# EAGLE board SparkFun_RFM97CW_Breakout-Panel (EAGLE 9.6.2), part 1 of 4
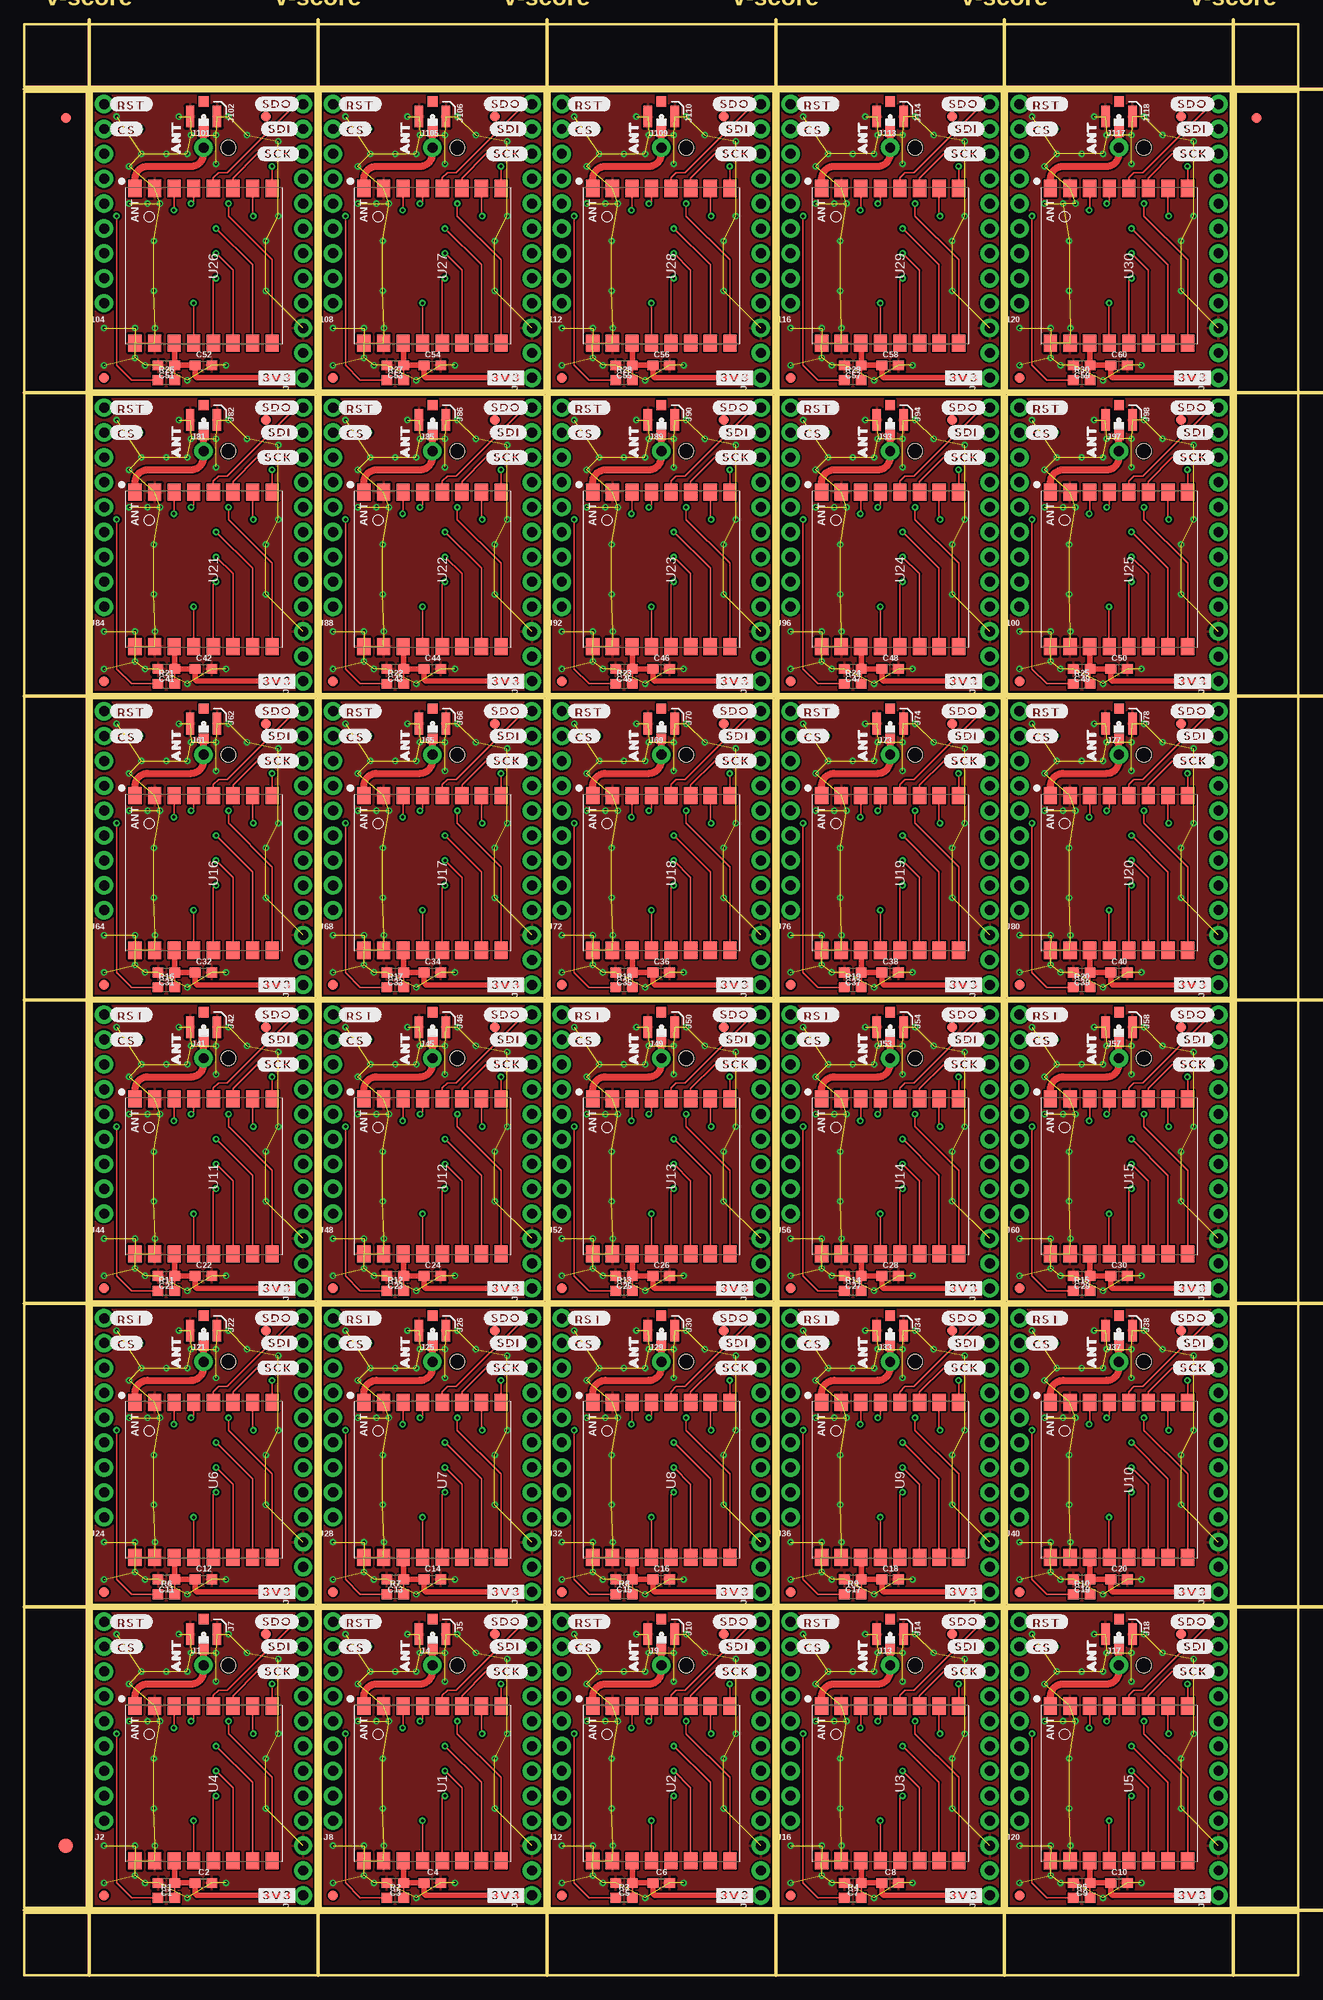
[diagram p0: board, top side]
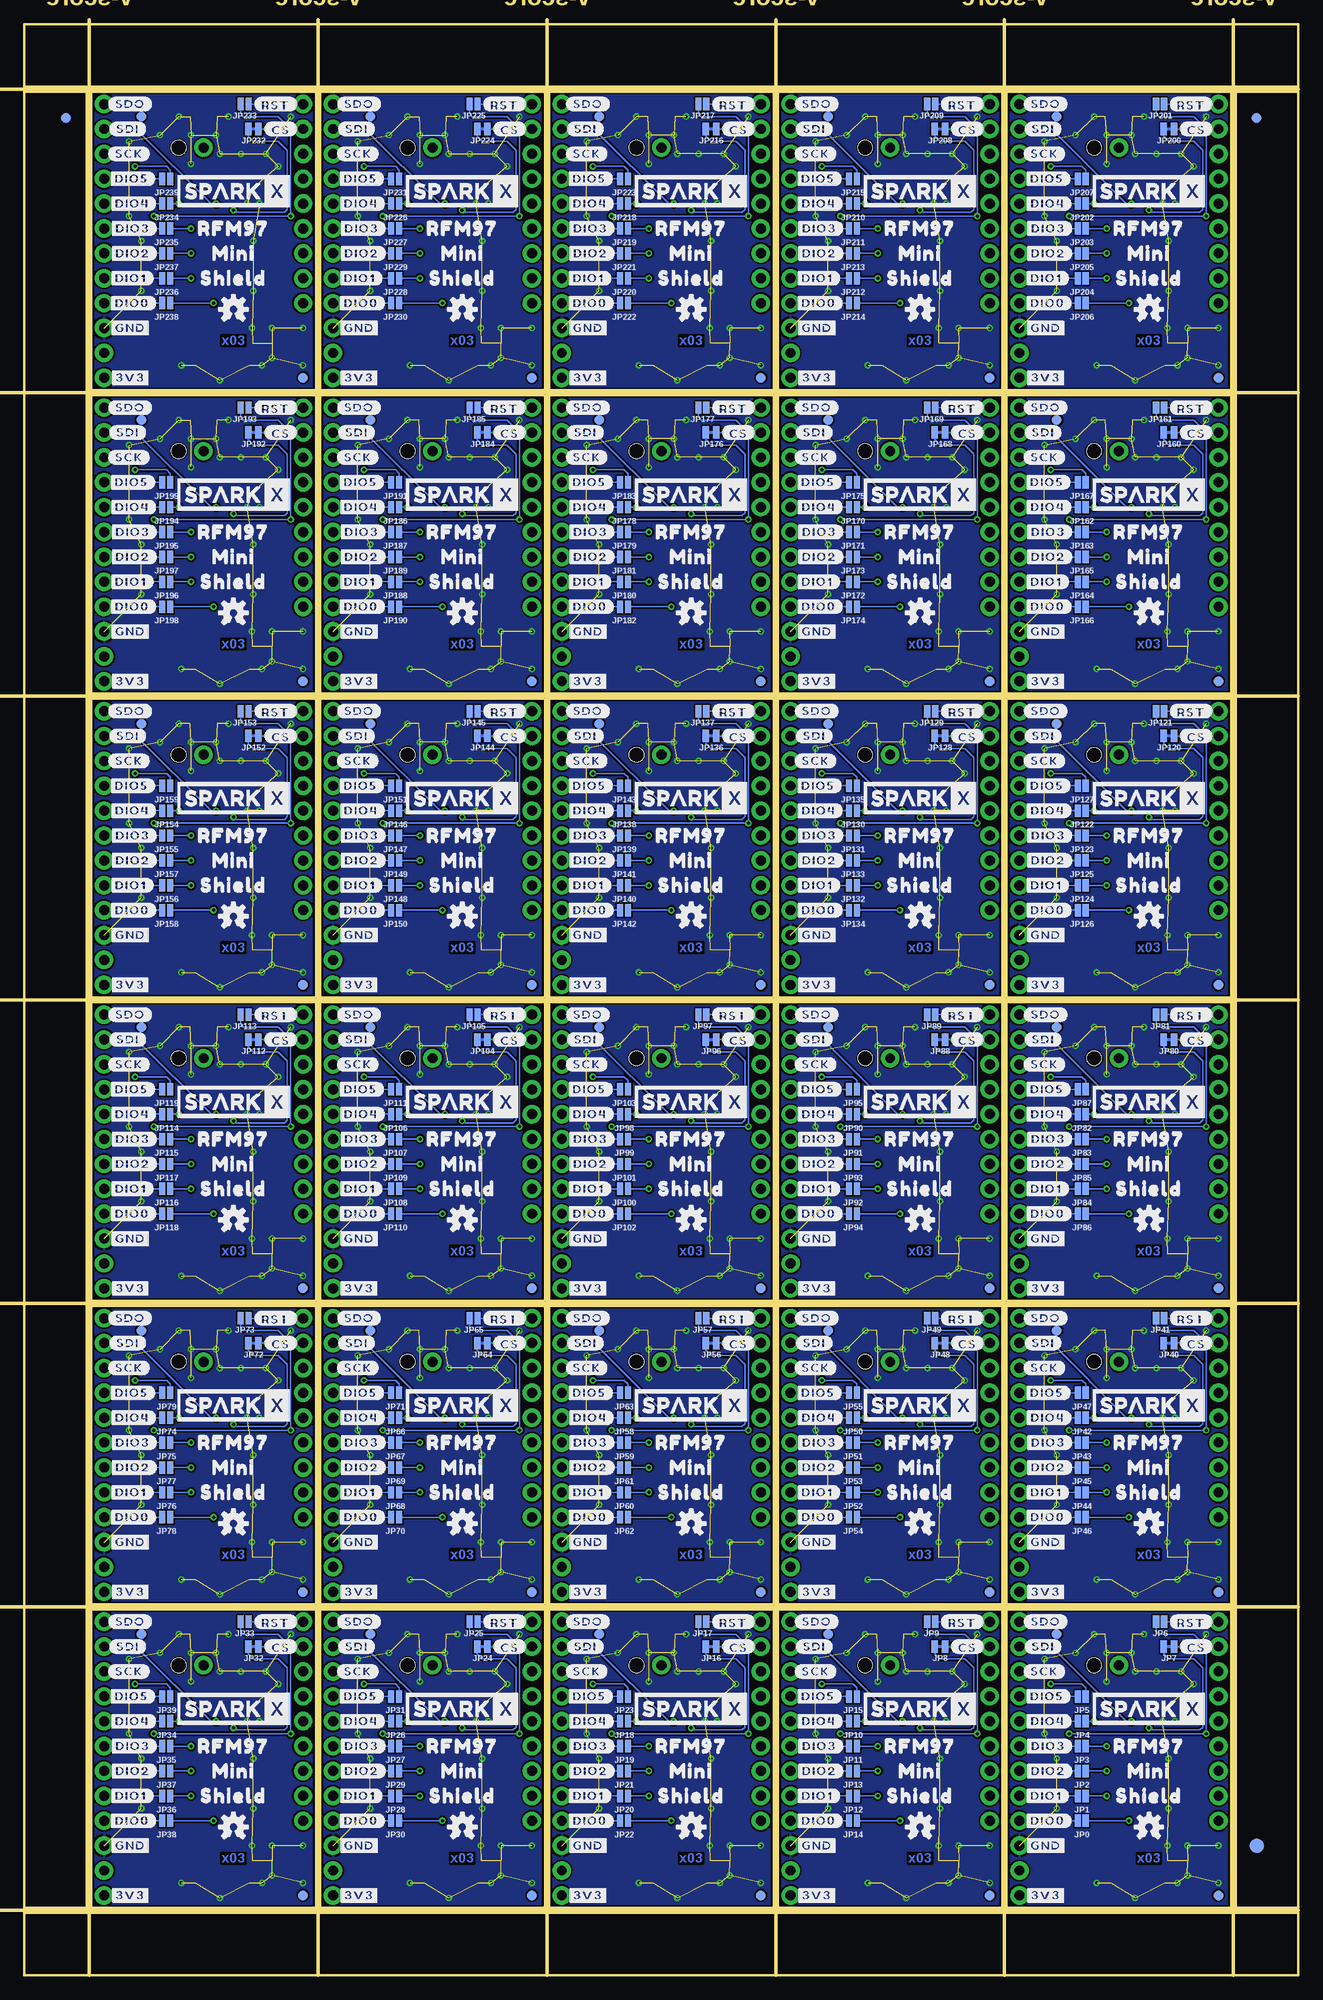
[diagram p1: board, bottom side, seen from below]

Size 130.05 x 199.14 mm. Coordinates in mm from the lower left corner, seen from the top.
Outline: 6.86,6.86 29.72,6.86 29.72,37.34 6.86,37.34 6.86,6.86
Outline: 30.23,6.86 53.09,6.86 53.09,37.34 30.23,37.34 30.23,6.86
Outline: 53.59,6.86 76.45,6.86 76.45,37.34 53.59,37.34 53.59,6.86
Outline: 76.96,6.86 99.82,6.86 99.82,37.34 76.96,37.34 76.96,6.86
Outline: 100.33,6.86 123.19,6.86 123.19,37.34 100.33,37.34 100.33,6.86
Outline: 6.86,37.85 29.72,37.85 29.72,68.33 6.86,68.33 6.86,37.85
Outline: 30.23,37.85 53.09,37.85 53.09,68.33 30.23,68.33 30.23,37.85
Outline: 53.59,37.85 76.45,37.85 76.45,68.33 53.59,68.33 53.59,37.85
Outline: 76.96,37.85 99.82,37.85 99.82,68.33 76.96,68.33 76.96,37.85
Outline: 100.33,37.85 123.19,37.85 123.19,68.33 100.33,68.33 100.33,37.85
Outline: 6.86,68.83 29.72,68.83 29.72,99.31 6.86,99.31 6.86,68.83
Outline: 30.23,68.83 53.09,68.83 53.09,99.31 30.23,99.31 30.23,68.83
Outline: 53.59,68.83 76.45,68.83 76.45,99.31 53.59,99.31 53.59,68.83
Outline: 76.96,68.83 99.82,68.83 99.82,99.31 76.96,99.31 76.96,68.83
Outline: 100.33,68.83 123.19,68.83 123.19,99.31 100.33,99.31 100.33,68.83
Outline: 6.86,99.82 29.72,99.82 29.72,130.3 6.86,130.3 6.86,99.82
Outline: 30.23,99.82 53.09,99.82 53.09,130.3 30.23,130.3 30.23,99.82
Outline: 53.59,99.82 76.45,99.82 76.45,130.3 53.59,130.3 53.59,99.82
Outline: 76.96,99.82 99.82,99.82 99.82,130.3 76.96,130.3 76.96,99.82
Outline: 100.33,99.82 123.19,99.82 123.19,130.3 100.33,130.3 100.33,99.82
Outline: 6.86,130.81 29.72,130.81 29.72,161.29 6.86,161.29 6.86,130.81
Outline: 30.23,130.81 53.09,130.81 53.09,161.29 30.23,161.29 30.23,130.81
Outline: 53.59,130.81 76.45,130.81 76.45,161.29 53.59,161.29 53.59,130.81
Outline: 76.96,130.81 99.82,130.81 99.82,161.29 76.96,161.29 76.96,130.81
Outline: 100.33,130.81 123.19,130.81 123.19,161.29 100.33,161.29 100.33,130.81
Outline: 6.86,161.8 29.72,161.8 29.72,192.28 6.86,192.28 6.86,161.8
Outline: 30.23,161.8 53.09,161.8 53.09,192.28 30.23,192.28 30.23,161.8
Outline: 53.59,161.8 76.45,161.8 76.45,192.28 53.59,192.28 53.59,161.8
Outline: 76.96,161.8 99.82,161.8 99.82,192.28 76.96,192.28 76.96,161.8
Outline: 100.33,161.8 123.19,161.8 123.19,192.28 100.33,192.28 100.33,161.8
Outline: 0,6.35 130.05,6.35 130.05,0 0,0 0,6.35
Outline: 123.7,192.28 130.05,192.28 130.05,6.86 123.7,6.86 123.7,192.28
Outline: 0,199.14 130.05,199.14 130.05,192.79 0,192.79 0,199.14
Outline: 0,192.28 6.35,192.28 6.35,6.86 0,6.86 0,192.28
Copper layers (1*16): Top 0.035mm / dielectric 1.5mm / Bottom 0.035mm
Design rules "SparkFun_RFM97CW_Breakout": minimum track width 7mil, minimum drill 0.3mm, track to track 7mil, track to pad 7mil, pad to pad 7mil, via to via 7mil, smd to smd 7mil, copper to edge 7mil, drill to drill 7mil, minimum pad ring 7mil, minimum via ring 7mil, stop-mask expansion 3mil, vias tented up to drill 25mil, thermal gap 10mil
Holes 1.5 mm at 20.83,31.62 44.2,31.62 67.56,31.62 90.93,31.62 114.3,31.62 20.83,62.61 44.2,62.61 67.56,62.61 90.93,62.61 114.3,62.61 20.83,93.6 44.2,93.6 67.56,93.6 90.93,93.6 114.3,93.6 20.83,124.59 44.2,124.59 67.56,124.59 90.93,124.59 114.3,124.59 20.83,155.58 44.2,155.58 67.56,155.58 90.93,155.58 114.3,155.58 20.83,186.56 44.2,186.56 67.56,186.56 90.93,186.56 114.3,186.56
tRestrict: area 17.5,33.9 to 19.1,35.7; area 40.9,33.9 to 42.4,35.7; area 64.3,33.9 to 65.8,35.7; area 87.6,33.9 to 89.2,35.7; area 111,33.9 to 112.5,35.7; area 17.5,64.9 to 19.1,66.7; area 40.9,64.9 to 42.4,66.7; area 64.3,64.9 to 65.8,66.7; area 87.6,64.9 to 89.2,66.7; area 111,64.9 to 112.5,66.7; area 17.5,95.9 to 19.1,97.7; area 40.9,95.9 to 42.4,97.7; area 64.3,95.9 to 65.8,97.7; area 87.6,95.9 to 89.2,97.7; area 111,95.9 to 112.5,97.7; area 17.5,126.9 to 19.1,128.7; area 40.9,126.9 to 42.4,128.7; area 64.3,126.9 to 65.8,128.7; area 87.6,126.9 to 89.2,128.7; area 111,126.9 to 112.5,128.7; area 17.5,157.9 to 19.1,159.6; area 40.9,157.9 to 42.4,159.6; area 64.3,157.9 to 65.8,159.6; area 87.6,157.9 to 89.2,159.6; area 111,157.9 to 112.5,159.6; area 17.5,188.8 to 19.1,190.6; area 40.9,188.8 to 42.4,190.6; area 64.3,188.8 to 65.8,190.6; area 87.6,188.8 to 89.2,190.6; area 111,188.8 to 112.5,190.6
Milling: 13 lines

## Footprints (pad centres in the part's own frame; a part is rotated, then mirrored left to right if it is on the bottom)
0603 = smd 1.1 x 1: 1 -0.85,0; 2 0.85,0
FIDUCIAL-1X2 = smd 1 x 1: 1 0,0
FIDUCIAL-1.5X3 = smd 1.5 x 1.5: 1 0,0
1X01_NO_SILK = drill 1.016 pad 1.88: 1 0,0
1X09_NO_SILK = drill 1.016 pad 1.88: 1 0,0; 2 2.54,0; 3 5.08,0; 4 7.62,0; 5 10.16,0; 6 12.7,0; 7 15.24,0; 8 17.78,0; 9 20.32,0
1X12_NO_SILK = drill 1.016 pad 1.88: 1 0,0; 2 2.54,0; 3 5.08,0; 4 7.62,0; 5 10.16,0; 6 12.7,0; 7 15.24,0; 8 17.78,0; 9 20.32,0; 10 22.86,0; 11 25.4,0; 12 27.94,0
U.FL = smd 2.2 x 0.85: 1 0,1.375; 2 0,-1.375 | smd 1.05 x 1: FEED 1.525,0; NC -1.525,0
SMT-JUMPER_2_NO_NO-SILK = smd 0.635 x 1.27: 1 -0.406,0; 2 0.406,0
SMT-JUMPER_2_NC_TRACE_NO-SILK = smd 0.66 x 1.27: 1 -0.521,0; 2 0.521,0
RFM97 = smd 1.75 x 1.35: 3V3 7.9,-3; !CS! -7.9,-3; !RST -7.9,5; ANT -7.9,-7; DIO0 7.9,-1; DIO1 7.9,1; DIO2 7.9,3; DIO3 7.9,5; DIO4 7.9,7; DIO5 -7.9,7; GND -7.9,-5; GND@1 7.9,-7; GND@2 7.9,-5; SCK -7.9,3; SDI -7.9,-1; SDO -7.9,1

## Placement (x,y rotation side)
C1  10uF  [0603]  14.48,9.4 180 top
C2  0.1uF  [0603]  18.29,9.4 0 top
C3  10uF  [0603]  37.85,9.4 180 top
C4  0.1uF  [0603]  41.66,9.4 0 top
C5  10uF  [0603]  61.21,9.4 180 top
C6  0.1uF  [0603]  65.02,9.4 0 top
C7  10uF  [0603]  84.58,9.4 180 top
C8  0.1uF  [0603]  88.39,9.4 0 top
C9  10uF  [0603]  107.95,9.4 180 top
C10  0.1uF  [0603]  111.76,9.4 0 top
C11  10uF  [0603]  14.48,40.39 180 top
C12  0.1uF  [0603]  18.29,40.39 0 top
C13  10uF  [0603]  37.85,40.39 180 top
C14  0.1uF  [0603]  41.66,40.39 0 top
C15  10uF  [0603]  61.21,40.39 180 top
C16  0.1uF  [0603]  65.02,40.39 0 top
C17  10uF  [0603]  84.58,40.39 180 top
C18  0.1uF  [0603]  88.39,40.39 0 top
C19  10uF  [0603]  107.95,40.39 180 top
C20  0.1uF  [0603]  111.76,40.39 0 top
C21  10uF  [0603]  14.48,71.37 180 top
C22  0.1uF  [0603]  18.29,71.37 0 top
C23  10uF  [0603]  37.85,71.37 180 top
C24  0.1uF  [0603]  41.66,71.37 0 top
C25  10uF  [0603]  61.21,71.37 180 top
C26  0.1uF  [0603]  65.02,71.37 0 top
C27  10uF  [0603]  84.58,71.37 180 top
C28  0.1uF  [0603]  88.39,71.37 0 top
C29  10uF  [0603]  107.95,71.37 180 top
C30  0.1uF  [0603]  111.76,71.37 0 top
C31  10uF  [0603]  14.48,102.36 180 top
C32  0.1uF  [0603]  18.29,102.36 0 top
C33  10uF  [0603]  37.85,102.36 180 top
C34  0.1uF  [0603]  41.66,102.36 0 top
C35  10uF  [0603]  61.21,102.36 180 top
C36  0.1uF  [0603]  65.02,102.36 0 top
C37  10uF  [0603]  84.58,102.36 180 top
C38  0.1uF  [0603]  88.39,102.36 0 top
C39  10uF  [0603]  107.95,102.36 180 top
C40  0.1uF  [0603]  111.76,102.36 0 top
C41  10uF  [0603]  14.48,133.35 180 top
C42  0.1uF  [0603]  18.29,133.35 0 top
C43  10uF  [0603]  37.85,133.35 180 top
C44  0.1uF  [0603]  41.66,133.35 0 top
C45  10uF  [0603]  61.21,133.35 180 top
C46  0.1uF  [0603]  65.02,133.35 0 top
C47  10uF  [0603]  84.58,133.35 180 top
C48  0.1uF  [0603]  88.39,133.35 0 top
C49  10uF  [0603]  107.95,133.35 180 top
C50  0.1uF  [0603]  111.76,133.35 0 top
C51  10uF  [0603]  14.48,164.34 180 top
C52  0.1uF  [0603]  18.29,164.34 0 top
C53  10uF  [0603]  37.85,164.34 180 top
C54  0.1uF  [0603]  41.66,164.34 0 top
C55  10uF  [0603]  61.21,164.34 180 top
C56  0.1uF  [0603]  65.02,164.34 0 top
C57  10uF  [0603]  84.58,164.34 180 top
C58  0.1uF  [0603]  88.39,164.34 0 top
C59  10uF  [0603]  107.95,164.34 180 top
C60  0.1uF  [0603]  111.76,164.34 0 top
E$1  [FIDUCIAL-1X2]  4.23,189.61 0 top
E$2  [FIDUCIAL-1X2]  4.23,189.61 0 bottom
E$3  [FIDUCIAL-1X2]  125.81,189.61 0 top
E$4  [FIDUCIAL-1X2]  125.81,189.61 0 bottom
E$5  [FIDUCIAL-1.5X3]  4.23,13.21 0 top
E$6  [FIDUCIAL-1.5X3]  4.23,13.21 0 bottom
FID1  FIDUCIAL1X2  [FIDUCIAL-1X2]  8.13,8.13 0 top
FID2  FIDUCIAL1X2  [FIDUCIAL-1X2]  24.64,34.8 0 top
FID3  FIDUCIAL1X2  [FIDUCIAL-1X2]  8.13,8.13 0 bottom
FID4  FIDUCIAL1X2  [FIDUCIAL-1X2]  24.64,34.8 0 bottom
FID5  FIDUCIAL1X2  [FIDUCIAL-1X2]  31.5,8.13 0 top
FID6  FIDUCIAL1X2  [FIDUCIAL-1X2]  48.01,34.8 0 top
FID7  FIDUCIAL1X2  [FIDUCIAL-1X2]  31.5,8.13 0 bottom
FID8  FIDUCIAL1X2  [FIDUCIAL-1X2]  48.01,34.8 0 bottom
FID9  FIDUCIAL1X2  [FIDUCIAL-1X2]  54.86,8.13 0 top
FID10  FIDUCIAL1X2  [FIDUCIAL-1X2]  71.37,34.8 0 top
FID11  FIDUCIAL1X2  [FIDUCIAL-1X2]  54.86,8.13 0 bottom
FID12  FIDUCIAL1X2  [FIDUCIAL-1X2]  71.37,34.8 0 bottom
FID13  FIDUCIAL1X2  [FIDUCIAL-1X2]  78.23,8.13 0 top
FID14  FIDUCIAL1X2  [FIDUCIAL-1X2]  94.74,34.8 0 top
FID15  FIDUCIAL1X2  [FIDUCIAL-1X2]  78.23,8.13 0 bottom
FID16  FIDUCIAL1X2  [FIDUCIAL-1X2]  94.74,34.8 0 bottom
FID17  FIDUCIAL1X2  [FIDUCIAL-1X2]  101.6,8.13 0 top
FID18  FIDUCIAL1X2  [FIDUCIAL-1X2]  118.11,34.8 0 top
FID19  FIDUCIAL1X2  [FIDUCIAL-1X2]  101.6,8.13 0 bottom
FID20  FIDUCIAL1X2  [FIDUCIAL-1X2]  118.11,34.8 0 bottom
FID21  FIDUCIAL1X2  [FIDUCIAL-1X2]  8.13,39.12 0 top
FID22  FIDUCIAL1X2  [FIDUCIAL-1X2]  24.64,65.79 0 top
FID23  FIDUCIAL1X2  [FIDUCIAL-1X2]  8.13,39.12 0 bottom
FID24  FIDUCIAL1X2  [FIDUCIAL-1X2]  24.64,65.79 0 bottom
FID25  FIDUCIAL1X2  [FIDUCIAL-1X2]  31.5,39.12 0 top
FID26  FIDUCIAL1X2  [FIDUCIAL-1X2]  48.01,65.79 0 top
FID27  FIDUCIAL1X2  [FIDUCIAL-1X2]  31.5,39.12 0 bottom
FID28  FIDUCIAL1X2  [FIDUCIAL-1X2]  48.01,65.79 0 bottom
FID29  FIDUCIAL1X2  [FIDUCIAL-1X2]  54.86,39.12 0 top
FID30  FIDUCIAL1X2  [FIDUCIAL-1X2]  71.37,65.79 0 top
FID31  FIDUCIAL1X2  [FIDUCIAL-1X2]  54.86,39.12 0 bottom
FID32  FIDUCIAL1X2  [FIDUCIAL-1X2]  71.37,65.79 0 bottom
FID33  FIDUCIAL1X2  [FIDUCIAL-1X2]  78.23,39.12 0 top
FID34  FIDUCIAL1X2  [FIDUCIAL-1X2]  94.74,65.79 0 top
FID35  FIDUCIAL1X2  [FIDUCIAL-1X2]  78.23,39.12 0 bottom
FID36  FIDUCIAL1X2  [FIDUCIAL-1X2]  94.74,65.79 0 bottom
FID37  FIDUCIAL1X2  [FIDUCIAL-1X2]  101.6,39.12 0 top
FID38  FIDUCIAL1X2  [FIDUCIAL-1X2]  118.11,65.79 0 top
FID39  FIDUCIAL1X2  [FIDUCIAL-1X2]  101.6,39.12 0 bottom
FID40  FIDUCIAL1X2  [FIDUCIAL-1X2]  118.11,65.79 0 bottom
FID41  FIDUCIAL1X2  [FIDUCIAL-1X2]  8.13,70.1 0 top
FID42  FIDUCIAL1X2  [FIDUCIAL-1X2]  24.64,96.77 0 top
FID43  FIDUCIAL1X2  [FIDUCIAL-1X2]  8.13,70.1 0 bottom
FID44  FIDUCIAL1X2  [FIDUCIAL-1X2]  24.64,96.77 0 bottom
FID45  FIDUCIAL1X2  [FIDUCIAL-1X2]  31.5,70.1 0 top
FID46  FIDUCIAL1X2  [FIDUCIAL-1X2]  48.01,96.77 0 top
FID47  FIDUCIAL1X2  [FIDUCIAL-1X2]  31.5,70.1 0 bottom
FID48  FIDUCIAL1X2  [FIDUCIAL-1X2]  48.01,96.77 0 bottom
FID49  FIDUCIAL1X2  [FIDUCIAL-1X2]  54.86,70.1 0 top
FID50  FIDUCIAL1X2  [FIDUCIAL-1X2]  71.37,96.77 0 top
FID51  FIDUCIAL1X2  [FIDUCIAL-1X2]  54.86,70.1 0 bottom
FID52  FIDUCIAL1X2  [FIDUCIAL-1X2]  71.37,96.77 0 bottom
FID53  FIDUCIAL1X2  [FIDUCIAL-1X2]  78.23,70.1 0 top
FID54  FIDUCIAL1X2  [FIDUCIAL-1X2]  94.74,96.77 0 top
FID55  FIDUCIAL1X2  [FIDUCIAL-1X2]  78.23,70.1 0 bottom
FID56  FIDUCIAL1X2  [FIDUCIAL-1X2]  94.74,96.77 0 bottom
FID57  FIDUCIAL1X2  [FIDUCIAL-1X2]  101.6,70.1 0 top
FID58  FIDUCIAL1X2  [FIDUCIAL-1X2]  118.11,96.77 0 top
FID59  FIDUCIAL1X2  [FIDUCIAL-1X2]  101.6,70.1 0 bottom
FID60  FIDUCIAL1X2  [FIDUCIAL-1X2]  118.11,96.77 0 bottom
FID61  FIDUCIAL1X2  [FIDUCIAL-1X2]  8.13,101.09 0 top
FID62  FIDUCIAL1X2  [FIDUCIAL-1X2]  24.64,127.76 0 top
FID63  FIDUCIAL1X2  [FIDUCIAL-1X2]  8.13,101.09 0 bottom
FID64  FIDUCIAL1X2  [FIDUCIAL-1X2]  24.64,127.76 0 bottom
FID65  FIDUCIAL1X2  [FIDUCIAL-1X2]  31.5,101.09 0 top
FID66  FIDUCIAL1X2  [FIDUCIAL-1X2]  48.01,127.76 0 top
FID67  FIDUCIAL1X2  [FIDUCIAL-1X2]  31.5,101.09 0 bottom
FID68  FIDUCIAL1X2  [FIDUCIAL-1X2]  48.01,127.76 0 bottom
FID69  FIDUCIAL1X2  [FIDUCIAL-1X2]  54.86,101.09 0 top
FID70  FIDUCIAL1X2  [FIDUCIAL-1X2]  71.37,127.76 0 top
FID71  FIDUCIAL1X2  [FIDUCIAL-1X2]  54.86,101.09 0 bottom
FID72  FIDUCIAL1X2  [FIDUCIAL-1X2]  71.37,127.76 0 bottom
FID73  FIDUCIAL1X2  [FIDUCIAL-1X2]  78.23,101.09 0 top
FID74  FIDUCIAL1X2  [FIDUCIAL-1X2]  94.74,127.76 0 top
FID75  FIDUCIAL1X2  [FIDUCIAL-1X2]  78.23,101.09 0 bottom
FID76  FIDUCIAL1X2  [FIDUCIAL-1X2]  94.74,127.76 0 bottom
FID77  FIDUCIAL1X2  [FIDUCIAL-1X2]  101.6,101.09 0 top
FID78  FIDUCIAL1X2  [FIDUCIAL-1X2]  118.11,127.76 0 top
FID79  FIDUCIAL1X2  [FIDUCIAL-1X2]  101.6,101.09 0 bottom
FID80  FIDUCIAL1X2  [FIDUCIAL-1X2]  118.11,127.76 0 bottom
FID81  FIDUCIAL1X2  [FIDUCIAL-1X2]  8.13,132.08 0 top
FID82  FIDUCIAL1X2  [FIDUCIAL-1X2]  24.64,158.75 0 top
FID83  FIDUCIAL1X2  [FIDUCIAL-1X2]  8.13,132.08 0 bottom
FID84  FIDUCIAL1X2  [FIDUCIAL-1X2]  24.64,158.75 0 bottom
FID85  FIDUCIAL1X2  [FIDUCIAL-1X2]  31.5,132.08 0 top
FID86  FIDUCIAL1X2  [FIDUCIAL-1X2]  48.01,158.75 0 top
FID87  FIDUCIAL1X2  [FIDUCIAL-1X2]  31.5,132.08 0 bottom
FID88  FIDUCIAL1X2  [FIDUCIAL-1X2]  48.01,158.75 0 bottom
FID89  FIDUCIAL1X2  [FIDUCIAL-1X2]  54.86,132.08 0 top
FID90  FIDUCIAL1X2  [FIDUCIAL-1X2]  71.37,158.75 0 top
FID91  FIDUCIAL1X2  [FIDUCIAL-1X2]  54.86,132.08 0 bottom
FID92  FIDUCIAL1X2  [FIDUCIAL-1X2]  71.37,158.75 0 bottom
FID93  FIDUCIAL1X2  [FIDUCIAL-1X2]  78.23,132.08 0 top
FID94  FIDUCIAL1X2  [FIDUCIAL-1X2]  94.74,158.75 0 top
FID95  FIDUCIAL1X2  [FIDUCIAL-1X2]  78.23,132.08 0 bottom
FID96  FIDUCIAL1X2  [FIDUCIAL-1X2]  94.74,158.75 0 bottom
FID97  FIDUCIAL1X2  [FIDUCIAL-1X2]  101.6,132.08 0 top
FID98  FIDUCIAL1X2  [FIDUCIAL-1X2]  118.11,158.75 0 top
FID99  FIDUCIAL1X2  [FIDUCIAL-1X2]  101.6,132.08 0 bottom
FID100  FIDUCIAL1X2  [FIDUCIAL-1X2]  118.11,158.75 0 bottom
FID101  FIDUCIAL1X2  [FIDUCIAL-1X2]  8.13,163.07 0 top
FID102  FIDUCIAL1X2  [FIDUCIAL-1X2]  24.64,189.74 0 top
FID103  FIDUCIAL1X2  [FIDUCIAL-1X2]  8.13,163.07 0 bottom
FID104  FIDUCIAL1X2  [FIDUCIAL-1X2]  24.64,189.74 0 bottom
FID105  FIDUCIAL1X2  [FIDUCIAL-1X2]  31.5,163.07 0 top
FID106  FIDUCIAL1X2  [FIDUCIAL-1X2]  48.01,189.74 0 top
FID107  FIDUCIAL1X2  [FIDUCIAL-1X2]  31.5,163.07 0 bottom
FID108  FIDUCIAL1X2  [FIDUCIAL-1X2]  48.01,189.74 0 bottom
FID109  FIDUCIAL1X2  [FIDUCIAL-1X2]  54.86,163.07 0 top
FID110  FIDUCIAL1X2  [FIDUCIAL-1X2]  71.37,189.74 0 top
FID111  FIDUCIAL1X2  [FIDUCIAL-1X2]  54.86,163.07 0 bottom
FID112  FIDUCIAL1X2  [FIDUCIAL-1X2]  71.37,189.74 0 bottom
FID113  FIDUCIAL1X2  [FIDUCIAL-1X2]  78.23,163.07 0 top
FID114  FIDUCIAL1X2  [FIDUCIAL-1X2]  94.74,189.74 0 top
FID115  FIDUCIAL1X2  [FIDUCIAL-1X2]  78.23,163.07 0 bottom
FID116  FIDUCIAL1X2  [FIDUCIAL-1X2]  94.74,189.74 0 bottom
FID117  FIDUCIAL1X2  [FIDUCIAL-1X2]  101.6,163.07 0 top
FID118  FIDUCIAL1X2  [FIDUCIAL-1X2]  118.11,189.74 0 top
FID119  FIDUCIAL1X2  [FIDUCIAL-1X2]  101.6,163.07 0 bottom
FID120  FIDUCIAL1X2  [FIDUCIAL-1X2]  118.11,189.74 0 bottom
J1  [1X01_NO_SILK]  18.29,31.62 0 top
J2  [1X09_NO_SILK]  8.13,15.75 90 top
J3  [1X12_NO_SILK]  28.45,8.13 90 top
J4  [1X01_NO_SILK]  41.66,31.62 0 top
J5  U.FL  [U.FL]  41.66,34.8 270 top
J6  [1X12_NO_SILK]  51.82,8.13 90 top
J7  U.FL  [U.FL]  18.29,34.8 270 top
J8  [1X09_NO_SILK]  31.5,15.75 90 top
J9  [1X01_NO_SILK]  65.02,31.62 0 top
J10  U.FL  [U.FL]  65.02,34.8 270 top
J11  [1X12_NO_SILK]  75.18,8.13 90 top
J12  [1X09_NO_SILK]  54.86,15.75 90 top
J13  [1X01_NO_SILK]  88.39,31.62 0 top
J14  U.FL  [U.FL]  88.39,34.8 270 top
J15  [1X12_NO_SILK]  98.55,8.13 90 top
J16  [1X09_NO_SILK]  78.23,15.75 90 top
J17  [1X01_NO_SILK]  111.76,31.62 0 top
J18  U.FL  [U.FL]  111.76,34.8 270 top
J19  [1X12_NO_SILK]  121.92,8.13 90 top
J20  [1X09_NO_SILK]  101.6,15.75 90 top
J21  [1X01_NO_SILK]  18.29,62.61 0 top
J22  U.FL  [U.FL]  18.29,65.79 270 top
J23  [1X12_NO_SILK]  28.45,39.12 90 top
J24  [1X09_NO_SILK]  8.13,46.74 90 top
J25  [1X01_NO_SILK]  41.66,62.61 0 top
J26  U.FL  [U.FL]  41.66,65.79 270 top
J27  [1X12_NO_SILK]  51.82,39.12 90 top
J28  [1X09_NO_SILK]  31.5,46.74 90 top
J29  [1X01_NO_SILK]  65.02,62.61 0 top
J30  U.FL  [U.FL]  65.02,65.79 270 top
J31  [1X12_NO_SILK]  75.18,39.12 90 top
J32  [1X09_NO_SILK]  54.86,46.74 90 top
J33  [1X01_NO_SILK]  88.39,62.61 0 top
J34  U.FL  [U.FL]  88.39,65.79 270 top
J35  [1X12_NO_SILK]  98.55,39.12 90 top
J36  [1X09_NO_SILK]  78.23,46.74 90 top
J37  [1X01_NO_SILK]  111.76,62.61 0 top
J38  U.FL  [U.FL]  111.76,65.79 270 top
J39  [1X12_NO_SILK]  121.92,39.12 90 top
J40  [1X09_NO_SILK]  101.6,46.74 90 top
J41  [1X01_NO_SILK]  18.29,93.6 0 top
J42  U.FL  [U.FL]  18.29,96.77 270 top
J43  [1X12_NO_SILK]  28.45,70.1 90 top
J44  [1X09_NO_SILK]  8.13,77.72 90 top
J45  [1X01_NO_SILK]  41.66,93.6 0 top
J46  U.FL  [U.FL]  41.66,96.77 270 top
J47  [1X12_NO_SILK]  51.82,70.1 90 top
J48  [1X09_NO_SILK]  31.5,77.72 90 top
J49  [1X01_NO_SILK]  65.02,93.6 0 top
J50  U.FL  [U.FL]  65.02,96.77 270 top
J51  [1X12_NO_SILK]  75.18,70.1 90 top
J52  [1X09_NO_SILK]  54.86,77.72 90 top
J53  [1X01_NO_SILK]  88.39,93.6 0 top
J54  U.FL  [U.FL]  88.39,96.77 270 top
J55  [1X12_NO_SILK]  98.55,70.1 90 top
J56  [1X09_NO_SILK]  78.23,77.72 90 top
J57  [1X01_NO_SILK]  111.76,93.6 0 top
J58  U.FL  [U.FL]  111.76,96.77 270 top
J59  [1X12_NO_SILK]  121.92,70.1 90 top
J60  [1X09_NO_SILK]  101.6,77.72 90 top
J61  [1X01_NO_SILK]  18.29,124.59 0 top
J62  U.FL  [U.FL]  18.29,127.76 270 top
J63  [1X12_NO_SILK]  28.45,101.09 90 top
J64  [1X09_NO_SILK]  8.13,108.71 90 top
J65  [1X01_NO_SILK]  41.66,124.59 0 top
J66  U.FL  [U.FL]  41.66,127.76 270 top
J67  [1X12_NO_SILK]  51.82,101.09 90 top
J68  [1X09_NO_SILK]  31.5,108.71 90 top
J69  [1X01_NO_SILK]  65.02,124.59 0 top
J70  U.FL  [U.FL]  65.02,127.76 270 top
J71  [1X12_NO_SILK]  75.18,101.09 90 top
J72  [1X09_NO_SILK]  54.86,108.71 90 top
J73  [1X01_NO_SILK]  88.39,124.59 0 top
J74  U.FL  [U.FL]  88.39,127.76 270 top
J75  [1X12_NO_SILK]  98.55,101.09 90 top
J76  [1X09_NO_SILK]  78.23,108.71 90 top
J77  [1X01_NO_SILK]  111.76,124.59 0 top
J78  U.FL  [U.FL]  111.76,127.76 270 top
J79  [1X12_NO_SILK]  121.92,101.09 90 top
J80  [1X09_NO_SILK]  101.6,108.71 90 top
J81  [1X01_NO_SILK]  18.29,155.58 0 top
J82  U.FL  [U.FL]  18.29,158.75 270 top
J83  [1X12_NO_SILK]  28.45,132.08 90 top
J84  [1X09_NO_SILK]  8.13,139.7 90 top
J85  [1X01_NO_SILK]  41.66,155.58 0 top
J86  U.FL  [U.FL]  41.66,158.75 270 top
J87  [1X12_NO_SILK]  51.82,132.08 90 top
J88  [1X09_NO_SILK]  31.5,139.7 90 top
J89  [1X01_NO_SILK]  65.02,155.58 0 top
J90  U.FL  [U.FL]  65.02,158.75 270 top
J91  [1X12_NO_SILK]  75.18,132.08 90 top
J92  [1X09_NO_SILK]  54.86,139.7 90 top
J93  [1X01_NO_SILK]  88.39,155.58 0 top
J94  U.FL  [U.FL]  88.39,158.75 270 top
J95  [1X12_NO_SILK]  98.55,132.08 90 top
J96  [1X09_NO_SILK]  78.23,139.7 90 top
J97  [1X01_NO_SILK]  111.76,155.58 0 top
J98  U.FL  [U.FL]  111.76,158.75 270 top
J99  [1X12_NO_SILK]  121.92,132.08 90 top
J100  [1X09_NO_SILK]  101.6,139.7 90 top
J101  [1X01_NO_SILK]  18.29,186.56 0 top
J102  U.FL  [U.FL]  18.29,189.74 270 top
J103  [1X12_NO_SILK]  28.45,163.07 90 top
J104  [1X09_NO_SILK]  8.13,170.69 90 top
J105  [1X01_NO_SILK]  41.66,186.56 0 top
J106  U.FL  [U.FL]  41.66,189.74 270 top
J107  [1X12_NO_SILK]  51.82,163.07 90 top
J108  [1X09_NO_SILK]  31.5,170.69 90 top
J109  [1X01_NO_SILK]  65.02,186.56 0 top
J110  U.FL  [U.FL]  65.02,189.74 270 top
J111  [1X12_NO_SILK]  75.18,163.07 90 top
J112  [1X09_NO_SILK]  54.86,170.69 90 top
J113  [1X01_NO_SILK]  88.39,186.56 0 top
J114  U.FL  [U.FL]  88.39,189.74 270 top
J115  [1X12_NO_SILK]  98.55,163.07 90 top
J116  [1X09_NO_SILK]  78.23,170.69 90 top
J117  [1X01_NO_SILK]  111.76,186.56 0 top
J118  U.FL  [U.FL]  111.76,189.74 270 top
J119  [1X12_NO_SILK]  121.92,163.07 90 top
J120  [1X09_NO_SILK]  101.6,170.69 90 top
JP0  JUMPER-SMT_2_NO_NO-SILK  [SMT-JUMPER_2_NO_NO-SILK]  22.1,15.75 180 bottom
JP1  JUMPER-SMT_2_NO_NO-SILK  [SMT-JUMPER_2_NO_NO-SILK]  22.1,18.29 180 bottom
JP2  JUMPER-SMT_2_NO_NO-SILK  [SMT-JUMPER_2_NO_NO-SILK]  22.1,20.83 180 bottom
JP3  JUMPER-SMT_2_NO_NO-SILK  [SMT-JUMPER_2_NO_NO-SILK]  22.1,23.37 180 bottom
JP4  JUMPER-SMT_2_NO_NO-SILK  [SMT-JUMPER_2_NO_NO-SILK]  22.1,25.91 180 bottom
JP5  JUMPER-SMT_2_NO_NO-SILK  [SMT-JUMPER_2_NO_NO-SILK]  22.1,28.45 180 bottom
JP6  JUMPER-SMT_2_NO_NO-SILK  [SMT-JUMPER_2_NO_NO-SILK]  14.1,36.07 0 bottom
JP7  JUMPER-SMT_2_NC_TRACE_NO-SILK  [SMT-JUMPER_2_NC_TRACE_NO-SILK]  13.21,33.53 0 bottom
JP8  JUMPER-SMT_2_NC_TRACE_NO-SILK  [SMT-JUMPER_2_NC_TRACE_NO-SILK]  36.58,33.53 0 bottom
JP9  JUMPER-SMT_2_NO_NO-SILK  [SMT-JUMPER_2_NO_NO-SILK]  37.46,36.07 0 bottom
JP10  JUMPER-SMT_2_NO_NO-SILK  [SMT-JUMPER_2_NO_NO-SILK]  45.47,25.91 180 bottom
JP11  JUMPER-SMT_2_NO_NO-SILK  [SMT-JUMPER_2_NO_NO-SILK]  45.47,23.37 180 bottom
JP12  JUMPER-SMT_2_NO_NO-SILK  [SMT-JUMPER_2_NO_NO-SILK]  45.47,18.29 180 bottom
JP13  JUMPER-SMT_2_NO_NO-SILK  [SMT-JUMPER_2_NO_NO-SILK]  45.47,20.83 180 bottom
JP14  JUMPER-SMT_2_NO_NO-SILK  [SMT-JUMPER_2_NO_NO-SILK]  45.47,15.75 180 bottom
JP15  JUMPER-SMT_2_NO_NO-SILK  [SMT-JUMPER_2_NO_NO-SILK]  45.47,28.45 180 bottom
JP16  JUMPER-SMT_2_NC_TRACE_NO-SILK  [SMT-JUMPER_2_NC_TRACE_NO-SILK]  59.94,33.53 0 bottom
JP17  JUMPER-SMT_2_NO_NO-SILK  [SMT-JUMPER_2_NO_NO-SILK]  60.83,36.07 0 bottom
JP18  JUMPER-SMT_2_NO_NO-SILK  [SMT-JUMPER_2_NO_NO-SILK]  68.83,25.91 180 bottom
JP19  JUMPER-SMT_2_NO_NO-SILK  [SMT-JUMPER_2_NO_NO-SILK]  68.83,23.37 180 bottom
JP20  JUMPER-SMT_2_NO_NO-SILK  [SMT-JUMPER_2_NO_NO-SILK]  68.83,18.29 180 bottom
JP21  JUMPER-SMT_2_NO_NO-SILK  [SMT-JUMPER_2_NO_NO-SILK]  68.83,20.83 180 bottom
JP22  JUMPER-SMT_2_NO_NO-SILK  [SMT-JUMPER_2_NO_NO-SILK]  68.83,15.75 180 bottom
JP23  JUMPER-SMT_2_NO_NO-SILK  [SMT-JUMPER_2_NO_NO-SILK]  68.83,28.45 180 bottom
JP24  JUMPER-SMT_2_NC_TRACE_NO-SILK  [SMT-JUMPER_2_NC_TRACE_NO-SILK]  83.31,33.53 0 bottom
JP25  JUMPER-SMT_2_NO_NO-SILK  [SMT-JUMPER_2_NO_NO-SILK]  84.2,36.07 0 bottom
JP26  JUMPER-SMT_2_NO_NO-SILK  [SMT-JUMPER_2_NO_NO-SILK]  92.2,25.91 180 bottom
JP27  JUMPER-SMT_2_NO_NO-SILK  [SMT-JUMPER_2_NO_NO-SILK]  92.2,23.37 180 bottom
JP28  JUMPER-SMT_2_NO_NO-SILK  [SMT-JUMPER_2_NO_NO-SILK]  92.2,18.29 180 bottom
JP29  JUMPER-SMT_2_NO_NO-SILK  [SMT-JUMPER_2_NO_NO-SILK]  92.2,20.83 180 bottom
JP30  JUMPER-SMT_2_NO_NO-SILK  [SMT-JUMPER_2_NO_NO-SILK]  92.2,15.75 180 bottom
JP31  JUMPER-SMT_2_NO_NO-SILK  [SMT-JUMPER_2_NO_NO-SILK]  92.2,28.45 180 bottom
JP32  JUMPER-SMT_2_NC_TRACE_NO-SILK  [SMT-JUMPER_2_NC_TRACE_NO-SILK]  106.68,33.53 0 bottom
JP33  JUMPER-SMT_2_NO_NO-SILK  [SMT-JUMPER_2_NO_NO-SILK]  107.57,36.07 0 bottom
JP34  JUMPER-SMT_2_NO_NO-SILK  [SMT-JUMPER_2_NO_NO-SILK]  115.57,25.91 180 bottom
JP35  JUMPER-SMT_2_NO_NO-SILK  [SMT-JUMPER_2_NO_NO-SILK]  115.57,23.37 180 bottom
JP36  JUMPER-SMT_2_NO_NO-SILK  [SMT-JUMPER_2_NO_NO-SILK]  115.57,18.29 180 bottom
JP37  JUMPER-SMT_2_NO_NO-SILK  [SMT-JUMPER_2_NO_NO-SILK]  115.57,20.83 180 bottom
JP38  JUMPER-SMT_2_NO_NO-SILK  [SMT-JUMPER_2_NO_NO-SILK]  115.57,15.75 180 bottom
JP39  JUMPER-SMT_2_NO_NO-SILK  [SMT-JUMPER_2_NO_NO-SILK]  115.57,28.45 180 bottom
JP40  JUMPER-SMT_2_NC_TRACE_NO-SILK  [SMT-JUMPER_2_NC_TRACE_NO-SILK]  13.21,64.52 0 bottom
JP41  JUMPER-SMT_2_NO_NO-SILK  [SMT-JUMPER_2_NO_NO-SILK]  14.1,67.06 0 bottom
JP42  JUMPER-SMT_2_NO_NO-SILK  [SMT-JUMPER_2_NO_NO-SILK]  22.1,56.9 180 bottom
JP43  JUMPER-SMT_2_NO_NO-SILK  [SMT-JUMPER_2_NO_NO-SILK]  22.1,54.36 180 bottom
JP44  JUMPER-SMT_2_NO_NO-SILK  [SMT-JUMPER_2_NO_NO-SILK]  22.1,49.28 180 bottom
JP45  JUMPER-SMT_2_NO_NO-SILK  [SMT-JUMPER_2_NO_NO-SILK]  22.1,51.82 180 bottom
JP46  JUMPER-SMT_2_NO_NO-SILK  [SMT-JUMPER_2_NO_NO-SILK]  22.1,46.74 180 bottom
JP47  JUMPER-SMT_2_NO_NO-SILK  [SMT-JUMPER_2_NO_NO-SILK]  22.1,59.44 180 bottom
JP48  JUMPER-SMT_2_NC_TRACE_NO-SILK  [SMT-JUMPER_2_NC_TRACE_NO-SILK]  36.58,64.52 0 bottom
JP49  JUMPER-SMT_2_NO_NO-SILK  [SMT-JUMPER_2_NO_NO-SILK]  37.46,67.06 0 bottom
JP50  JUMPER-SMT_2_NO_NO-SILK  [SMT-JUMPER_2_NO_NO-SILK]  45.47,56.9 180 bottom
JP51  JUMPER-SMT_2_NO_NO-SILK  [SMT-JUMPER_2_NO_NO-SILK]  45.47,54.36 180 bottom
JP52  JUMPER-SMT_2_NO_NO-SILK  [SMT-JUMPER_2_NO_NO-SILK]  45.47,49.28 180 bottom
JP53  JUMPER-SMT_2_NO_NO-SILK  [SMT-JUMPER_2_NO_NO-SILK]  45.47,51.82 180 bottom
JP54  JUMPER-SMT_2_NO_NO-SILK  [SMT-JUMPER_2_NO_NO-SILK]  45.47,46.74 180 bottom
JP55  JUMPER-SMT_2_NO_NO-SILK  [SMT-JUMPER_2_NO_NO-SILK]  45.47,59.44 180 bottom
JP56  JUMPER-SMT_2_NC_TRACE_NO-SILK  [SMT-JUMPER_2_NC_TRACE_NO-SILK]  59.94,64.52 0 bottom
JP57  JUMPER-SMT_2_NO_NO-SILK  [SMT-JUMPER_2_NO_NO-SILK]  60.83,67.06 0 bottom
JP58  JUMPER-SMT_2_NO_NO-SILK  [SMT-JUMPER_2_NO_NO-SILK]  68.83,56.9 180 bottom
JP59  JUMPER-SMT_2_NO_NO-SILK  [SMT-JUMPER_2_NO_NO-SILK]  68.83,54.36 180 bottom
JP60  JUMPER-SMT_2_NO_NO-SILK  [SMT-JUMPER_2_NO_NO-SILK]  68.83,49.28 180 bottom
JP61  JUMPER-SMT_2_NO_NO-SILK  [SMT-JUMPER_2_NO_NO-SILK]  68.83,51.82 180 bottom
JP62  JUMPER-SMT_2_NO_NO-SILK  [SMT-JUMPER_2_NO_NO-SILK]  68.83,46.74 180 bottom
JP63  JUMPER-SMT_2_NO_NO-SILK  [SMT-JUMPER_2_NO_NO-SILK]  68.83,59.44 180 bottom
JP64  JUMPER-SMT_2_NC_TRACE_NO-SILK  [SMT-JUMPER_2_NC_TRACE_NO-SILK]  83.31,64.52 0 bottom
JP65  JUMPER-SMT_2_NO_NO-SILK  [SMT-JUMPER_2_NO_NO-SILK]  84.2,67.06 0 bottom
JP66  JUMPER-SMT_2_NO_NO-SILK  [SMT-JUMPER_2_NO_NO-SILK]  92.2,56.9 180 bottom
JP67  JUMPER-SMT_2_NO_NO-SILK  [SMT-JUMPER_2_NO_NO-SILK]  92.2,54.36 180 bottom
JP68  JUMPER-SMT_2_NO_NO-SILK  [SMT-JUMPER_2_NO_NO-SILK]  92.2,49.28 180 bottom
JP69  JUMPER-SMT_2_NO_NO-SILK  [SMT-JUMPER_2_NO_NO-SILK]  92.2,51.82 180 bottom
JP70  JUMPER-SMT_2_NO_NO-SILK  [SMT-JUMPER_2_NO_NO-SILK]  92.2,46.74 180 bottom
JP71  JUMPER-SMT_2_NO_NO-SILK  [SMT-JUMPER_2_NO_NO-SILK]  92.2,59.44 180 bottom
JP72  JUMPER-SMT_2_NC_TRACE_NO-SILK  [SMT-JUMPER_2_NC_TRACE_NO-SILK]  106.68,64.52 0 bottom
JP73  JUMPER-SMT_2_NO_NO-SILK  [SMT-JUMPER_2_NO_NO-SILK]  107.57,67.06 0 bottom
JP74  JUMPER-SMT_2_NO_NO-SILK  [SMT-JUMPER_2_NO_NO-SILK]  115.57,56.9 180 bottom
JP75  JUMPER-SMT_2_NO_NO-SILK  [SMT-JUMPER_2_NO_NO-SILK]  115.57,54.36 180 bottom
JP76  JUMPER-SMT_2_NO_NO-SILK  [SMT-JUMPER_2_NO_NO-SILK]  115.57,49.28 180 bottom
JP77  JUMPER-SMT_2_NO_NO-SILK  [SMT-JUMPER_2_NO_NO-SILK]  115.57,51.82 180 bottom
JP78  JUMPER-SMT_2_NO_NO-SILK  [SMT-JUMPER_2_NO_NO-SILK]  115.57,46.74 180 bottom
JP79  JUMPER-SMT_2_NO_NO-SILK  [SMT-JUMPER_2_NO_NO-SILK]  115.57,59.44 180 bottom
JP80  JUMPER-SMT_2_NC_TRACE_NO-SILK  [SMT-JUMPER_2_NC_TRACE_NO-SILK]  13.21,95.5 0 bottom
JP81  JUMPER-SMT_2_NO_NO-SILK  [SMT-JUMPER_2_NO_NO-SILK]  14.1,98.04 0 bottom
JP82  JUMPER-SMT_2_NO_NO-SILK  [SMT-JUMPER_2_NO_NO-SILK]  22.1,87.88 180 bottom
JP83  JUMPER-SMT_2_NO_NO-SILK  [SMT-JUMPER_2_NO_NO-SILK]  22.1,85.34 180 bottom
JP84  JUMPER-SMT_2_NO_NO-SILK  [SMT-JUMPER_2_NO_NO-SILK]  22.1,80.26 180 bottom
JP85  JUMPER-SMT_2_NO_NO-SILK  [SMT-JUMPER_2_NO_NO-SILK]  22.1,82.8 180 bottom
JP86  JUMPER-SMT_2_NO_NO-SILK  [SMT-JUMPER_2_NO_NO-SILK]  22.1,77.72 180 bottom
JP87  JUMPER-SMT_2_NO_NO-SILK  [SMT-JUMPER_2_NO_NO-SILK]  22.1,90.42 180 bottom
JP88  JUMPER-SMT_2_NC_TRACE_NO-SILK  [SMT-JUMPER_2_NC_TRACE_NO-SILK]  36.58,95.5 0 bottom
JP89  JUMPER-SMT_2_NO_NO-SILK  [SMT-JUMPER_2_NO_NO-SILK]  37.46,98.04 0 bottom
JP90  JUMPER-SMT_2_NO_NO-SILK  [SMT-JUMPER_2_NO_NO-SILK]  45.47,87.88 180 bottom
JP91  JUMPER-SMT_2_NO_NO-SILK  [SMT-JUMPER_2_NO_NO-SILK]  45.47,85.34 180 bottom
JP92  JUMPER-SMT_2_NO_NO-SILK  [SMT-JUMPER_2_NO_NO-SILK]  45.47,80.26 180 bottom
JP93  JUMPER-SMT_2_NO_NO-SILK  [SMT-JUMPER_2_NO_NO-SILK]  45.47,82.8 180 bottom
JP94  JUMPER-SMT_2_NO_NO-SILK  [SMT-JUMPER_2_NO_NO-SILK]  45.47,77.72 180 bottom
JP95  JUMPER-SMT_2_NO_NO-SILK  [SMT-JUMPER_2_NO_NO-SILK]  45.47,90.42 180 bottom
JP96  JUMPER-SMT_2_NC_TRACE_NO-SILK  [SMT-JUMPER_2_NC_TRACE_NO-SILK]  59.94,95.5 0 bottom
JP97  JUMPER-SMT_2_NO_NO-SILK  [SMT-JUMPER_2_NO_NO-SILK]  60.83,98.04 0 bottom
JP98  JUMPER-SMT_2_NO_NO-SILK  [SMT-JUMPER_2_NO_NO-SILK]  68.83,87.88 180 bottom
JP99  JUMPER-SMT_2_NO_NO-SILK  [SMT-JUMPER_2_NO_NO-SILK]  68.83,85.34 180 bottom
JP100  JUMPER-SMT_2_NO_NO-SILK  [SMT-JUMPER_2_NO_NO-SILK]  68.83,80.26 180 bottom
JP101  JUMPER-SMT_2_NO_NO-SILK  [SMT-JUMPER_2_NO_NO-SILK]  68.83,82.8 180 bottom
JP102  JUMPER-SMT_2_NO_NO-SILK  [SMT-JUMPER_2_NO_NO-SILK]  68.83,77.72 180 bottom
JP103  JUMPER-SMT_2_NO_NO-SILK  [SMT-JUMPER_2_NO_NO-SILK]  68.83,90.42 180 bottom
JP104  JUMPER-SMT_2_NC_TRACE_NO-SILK  [SMT-JUMPER_2_NC_TRACE_NO-SILK]  83.31,95.5 0 bottom
JP105  JUMPER-SMT_2_NO_NO-SILK  [SMT-JUMPER_2_NO_NO-SILK]  84.2,98.04 0 bottom
JP106  JUMPER-SMT_2_NO_NO-SILK  [SMT-JUMPER_2_NO_NO-SILK]  92.2,87.88 180 bottom
JP107  JUMPER-SMT_2_NO_NO-SILK  [SMT-JUMPER_2_NO_NO-SILK]  92.2,85.34 180 bottom
JP108  JUMPER-SMT_2_NO_NO-SILK  [SMT-JUMPER_2_NO_NO-SILK]  92.2,80.26 180 bottom
JP109  JUMPER-SMT_2_NO_NO-SILK  [SMT-JUMPER_2_NO_NO-SILK]  92.2,82.8 180 bottom
JP110  JUMPER-SMT_2_NO_NO-SILK  [SMT-JUMPER_2_NO_NO-SILK]  92.2,77.72 180 bottom
JP111  JUMPER-SMT_2_NO_NO-SILK  [SMT-JUMPER_2_NO_NO-SILK]  92.2,90.42 180 bottom
JP112  JUMPER-SMT_2_NC_TRACE_NO-SILK  [SMT-JUMPER_2_NC_TRACE_NO-SILK]  106.68,95.5 0 bottom
JP113  JUMPER-SMT_2_NO_NO-SILK  [SMT-JUMPER_2_NO_NO-SILK]  107.57,98.04 0 bottom
JP114  JUMPER-SMT_2_NO_NO-SILK  [SMT-JUMPER_2_NO_NO-SILK]  115.57,87.88 180 bottom
JP115  JUMPER-SMT_2_NO_NO-SILK  [SMT-JUMPER_2_NO_NO-SILK]  115.57,85.34 180 bottom
JP116  JUMPER-SMT_2_NO_NO-SILK  [SMT-JUMPER_2_NO_NO-SILK]  115.57,80.26 180 bottom
JP117  JUMPER-SMT_2_NO_NO-SILK  [SMT-JUMPER_2_NO_NO-SILK]  115.57,82.8 180 bottom
JP118  JUMPER-SMT_2_NO_NO-SILK  [SMT-JUMPER_2_NO_NO-SILK]  115.57,77.72 180 bottom
JP119  JUMPER-SMT_2_NO_NO-SILK  [SMT-JUMPER_2_NO_NO-SILK]  115.57,90.42 180 bottom
JP120  JUMPER-SMT_2_NC_TRACE_NO-SILK  [SMT-JUMPER_2_NC_TRACE_NO-SILK]  13.21,126.49 0 bottom
JP121  JUMPER-SMT_2_NO_NO-SILK  [SMT-JUMPER_2_NO_NO-SILK]  14.1,129.03 0 bottom
JP122  JUMPER-SMT_2_NO_NO-SILK  [SMT-JUMPER_2_NO_NO-SILK]  22.1,118.87 180 bottom
JP123  JUMPER-SMT_2_NO_NO-SILK  [SMT-JUMPER_2_NO_NO-SILK]  22.1,116.33 180 bottom
JP124  JUMPER-SMT_2_NO_NO-SILK  [SMT-JUMPER_2_NO_NO-SILK]  22.1,111.25 180 bottom
JP125  JUMPER-SMT_2_NO_NO-SILK  [SMT-JUMPER_2_NO_NO-SILK]  22.1,113.79 180 bottom
JP126  JUMPER-SMT_2_NO_NO-SILK  [SMT-JUMPER_2_NO_NO-SILK]  22.1,108.71 180 bottom
JP127  JUMPER-SMT_2_NO_NO-SILK  [SMT-JUMPER_2_NO_NO-SILK]  22.1,121.41 180 bottom
JP128  JUMPER-SMT_2_NC_TRACE_NO-SILK  [SMT-JUMPER_2_NC_TRACE_NO-SILK]  36.58,126.49 0 bottom
JP129  JUMPER-SMT_2_NO_NO-SILK  [SMT-JUMPER_2_NO_NO-SILK]  37.46,129.03 0 bottom
JP130  JUMPER-SMT_2_NO_NO-SILK  [SMT-JUMPER_2_NO_NO-SILK]  45.47,118.87 180 bottom
JP131  JUMPER-SMT_2_NO_NO-SILK  [SMT-JUMPER_2_NO_NO-SILK]  45.47,116.33 180 bottom
JP132  JUMPER-SMT_2_NO_NO-SILK  [SMT-JUMPER_2_NO_NO-SILK]  45.47,111.25 180 bottom
JP133  JUMPER-SMT_2_NO_NO-SILK  [SMT-JUMPER_2_NO_NO-SILK]  45.47,113.79 180 bottom
JP134  JUMPER-SMT_2_NO_NO-SILK  [SMT-JUMPER_2_NO_NO-SILK]  45.47,108.71 180 bottom
JP135  JUMPER-SMT_2_NO_NO-SILK  [SMT-JUMPER_2_NO_NO-SILK]  45.47,121.41 180 bottom
JP136  JUMPER-SMT_2_NC_TRACE_NO-SILK  [SMT-JUMPER_2_NC_TRACE_NO-SILK]  59.94,126.49 0 bottom
JP137  JUMPER-SMT_2_NO_NO-SILK  [SMT-JUMPER_2_NO_NO-SILK]  60.83,129.03 0 bottom
JP138  JUMPER-SMT_2_NO_NO-SILK  [SMT-JUMPER_2_NO_NO-SILK]  68.83,118.87 180 bottom
JP139  JUMPER-SMT_2_NO_NO-SILK  [SMT-JUMPER_2_NO_NO-SILK]  68.83,116.33 180 bottom
JP140  JUMPER-SMT_2_NO_NO-SILK  [SMT-JUMPER_2_NO_NO-SILK]  68.83,111.25 180 bottom
JP141  JUMPER-SMT_2_NO_NO-SILK  [SMT-JUMPER_2_NO_NO-SILK]  68.83,113.79 180 bottom
JP142  JUMPER-SMT_2_NO_NO-SILK  [SMT-JUMPER_2_NO_NO-SILK]  68.83,108.71 180 bottom
JP143  JUMPER-SMT_2_NO_NO-SILK  [SMT-JUMPER_2_NO_NO-SILK]  68.83,121.41 180 bottom
JP144  JUMPER-SMT_2_NC_TRACE_NO-SILK  [SMT-JUMPER_2_NC_TRACE_NO-SILK]  83.31,126.49 0 bottom
JP145  JUMPER-SMT_2_NO_NO-SILK  [SMT-JUMPER_2_NO_NO-SILK]  84.2,129.03 0 bottom
JP146  JUMPER-SMT_2_NO_NO-SILK  [SMT-JUMPER_2_NO_NO-SILK]  92.2,118.87 180 bottom
JP147  JUMPER-SMT_2_NO_NO-SILK  [SMT-JUMPER_2_NO_NO-SILK]  92.2,116.33 180 bottom
JP148  JUMPER-SMT_2_NO_NO-SILK  [SMT-JUMPER_2_NO_NO-SILK]  92.2,111.25 180 bottom
JP149  JUMPER-SMT_2_NO_NO-SILK  [SMT-JUMPER_2_NO_NO-SILK]  92.2,113.79 180 bottom
JP150  JUMPER-SMT_2_NO_NO-SILK  [SMT-JUMPER_2_NO_NO-SILK]  92.2,108.71 180 bottom
JP151  JUMPER-SMT_2_NO_NO-SILK  [SMT-JUMPER_2_NO_NO-SILK]  92.2,121.41 180 bottom
JP152  JUMPER-SMT_2_NC_TRACE_NO-SILK  [SMT-JUMPER_2_NC_TRACE_NO-SILK]  106.68,126.49 0 bottom
JP153  JUMPER-SMT_2_NO_NO-SILK  [SMT-JUMPER_2_NO_NO-SILK]  107.57,129.03 0 bottom
JP154  JUMPER-SMT_2_NO_NO-SILK  [SMT-JUMPER_2_NO_NO-SILK]  115.57,118.87 180 bottom
JP155  JUMPER-SMT_2_NO_NO-SILK  [SMT-JUMPER_2_NO_NO-SILK]  115.57,116.33 180 bottom
JP156  JUMPER-SMT_2_NO_NO-SILK  [SMT-JUMPER_2_NO_NO-SILK]  115.57,111.25 180 bottom
JP157  JUMPER-SMT_2_NO_NO-SILK  [SMT-JUMPER_2_NO_NO-SILK]  115.57,113.79 180 bottom
JP158  JUMPER-SMT_2_NO_NO-SILK  [SMT-JUMPER_2_NO_NO-SILK]  115.57,108.71 180 bottom
JP159  JUMPER-SMT_2_NO_NO-SILK  [SMT-JUMPER_2_NO_NO-SILK]  115.57,121.41 180 bottom
JP160  JUMPER-SMT_2_NC_TRACE_NO-SILK  [SMT-JUMPER_2_NC_TRACE_NO-SILK]  13.21,157.48 0 bottom
JP161  JUMPER-SMT_2_NO_NO-SILK  [SMT-JUMPER_2_NO_NO-SILK]  14.1,160.02 0 bottom
JP162  JUMPER-SMT_2_NO_NO-SILK  [SMT-JUMPER_2_NO_NO-SILK]  22.1,149.86 180 bottom
JP163  JUMPER-SMT_2_NO_NO-SILK  [SMT-JUMPER_2_NO_NO-SILK]  22.1,147.32 180 bottom
JP164  JUMPER-SMT_2_NO_NO-SILK  [SMT-JUMPER_2_NO_NO-SILK]  22.1,142.24 180 bottom
JP165  JUMPER-SMT_2_NO_NO-SILK  [SMT-JUMPER_2_NO_NO-SILK]  22.1,144.78 180 bottom
JP166  JUMPER-SMT_2_NO_NO-SILK  [SMT-JUMPER_2_NO_NO-SILK]  22.1,139.7 180 bottom
JP167  JUMPER-SMT_2_NO_NO-SILK  [SMT-JUMPER_2_NO_NO-SILK]  22.1,152.4 180 bottom
JP168  JUMPER-SMT_2_NC_TRACE_NO-SILK  [SMT-JUMPER_2_NC_TRACE_NO-SILK]  36.58,157.48 0 bottom
JP169  JUMPER-SMT_2_NO_NO-SILK  [SMT-JUMPER_2_NO_NO-SILK]  37.46,160.02 0 bottom
JP170  JUMPER-SMT_2_NO_NO-SILK  [SMT-JUMPER_2_NO_NO-SILK]  45.47,149.86 180 bottom
JP171  JUMPER-SMT_2_NO_NO-SILK  [SMT-JUMPER_2_NO_NO-SILK]  45.47,147.32 180 bottom
JP172  JUMPER-SMT_2_NO_NO-SILK  [SMT-JUMPER_2_NO_NO-SILK]  45.47,142.24 180 bottom
JP173  JUMPER-SMT_2_NO_NO-SILK  [SMT-JUMPER_2_NO_NO-SILK]  45.47,144.78 180 bottom
JP174  JUMPER-SMT_2_NO_NO-SILK  [SMT-JUMPER_2_NO_NO-SILK]  45.47,139.7 180 bottom
JP175  JUMPER-SMT_2_NO_NO-SILK  [SMT-JUMPER_2_NO_NO-SILK]  45.47,152.4 180 bottom
JP176  JUMPER-SMT_2_NC_TRACE_NO-SILK  [SMT-JUMPER_2_NC_TRACE_NO-SILK]  59.94,157.48 0 bottom
JP177  JUMPER-SMT_2_NO_NO-SILK  [SMT-JUMPER_2_NO_NO-SILK]  60.83,160.02 0 bottom
JP178  JUMPER-SMT_2_NO_NO-SILK  [SMT-JUMPER_2_NO_NO-SILK]  68.83,149.86 180 bottom
JP179  JUMPER-SMT_2_NO_NO-SILK  [SMT-JUMPER_2_NO_NO-SILK]  68.83,147.32 180 bottom
JP180  JUMPER-SMT_2_NO_NO-SILK  [SMT-JUMPER_2_NO_NO-SILK]  68.83,142.24 180 bottom
JP181  JUMPER-SMT_2_NO_NO-SILK  [SMT-JUMPER_2_NO_NO-SILK]  68.83,144.78 180 bottom
JP182  JUMPER-SMT_2_NO_NO-SILK  [SMT-JUMPER_2_NO_NO-SILK]  68.83,139.7 180 bottom
JP183  JUMPER-SMT_2_NO_NO-SILK  [SMT-JUMPER_2_NO_NO-SILK]  68.83,152.4 180 bottom
JP184  JUMPER-SMT_2_NC_TRACE_NO-SILK  [SMT-JUMPER_2_NC_TRACE_NO-SILK]  83.31,157.48 0 bottom
JP185  JUMPER-SMT_2_NO_NO-SILK  [SMT-JUMPER_2_NO_NO-SILK]  84.2,160.02 0 bottom
JP186  JUMPER-SMT_2_NO_NO-SILK  [SMT-JUMPER_2_NO_NO-SILK]  92.2,149.86 180 bottom
JP187  JUMPER-SMT_2_NO_NO-SILK  [SMT-JUMPER_2_NO_NO-SILK]  92.2,147.32 180 bottom
JP188  JUMPER-SMT_2_NO_NO-SILK  [SMT-JUMPER_2_NO_NO-SILK]  92.2,142.24 180 bottom
JP189  JUMPER-SMT_2_NO_NO-SILK  [SMT-JUMPER_2_NO_NO-SILK]  92.2,144.78 180 bottom
JP190  JUMPER-SMT_2_NO_NO-SILK  [SMT-JUMPER_2_NO_NO-SILK]  92.2,139.7 180 bottom
JP191  JUMPER-SMT_2_NO_NO-SILK  [SMT-JUMPER_2_NO_NO-SILK]  92.2,152.4 180 bottom
JP192  JUMPER-SMT_2_NC_TRACE_NO-SILK  [SMT-JUMPER_2_NC_TRACE_NO-SILK]  106.68,157.48 0 bottom
JP193  JUMPER-SMT_2_NO_NO-SILK  [SMT-JUMPER_2_NO_NO-SILK]  107.57,160.02 0 bottom
JP194  JUMPER-SMT_2_NO_NO-SILK  [SMT-JUMPER_2_NO_NO-SILK]  115.57,149.86 180 bottom
JP195  JUMPER-SMT_2_NO_NO-SILK  [SMT-JUMPER_2_NO_NO-SILK]  115.57,147.32 180 bottom
JP196  JUMPER-SMT_2_NO_NO-SILK  [SMT-JUMPER_2_NO_NO-SILK]  115.57,142.24 180 bottom
JP197  JUMPER-SMT_2_NO_NO-SILK  [SMT-JUMPER_2_NO_NO-SILK]  115.57,144.78 180 bottom
JP198  JUMPER-SMT_2_NO_NO-SILK  [SMT-JUMPER_2_NO_NO-SILK]  115.57,139.7 180 bottom
JP199  JUMPER-SMT_2_NO_NO-SILK  [SMT-JUMPER_2_NO_NO-SILK]  115.57,152.4 180 bottom
JP200  JUMPER-SMT_2_NC_TRACE_NO-SILK  [SMT-JUMPER_2_NC_TRACE_NO-SILK]  13.21,188.47 0 bottom
JP201  JUMPER-SMT_2_NO_NO-SILK  [SMT-JUMPER_2_NO_NO-SILK]  14.1,191.01 0 bottom
JP202  JUMPER-SMT_2_NO_NO-SILK  [SMT-JUMPER_2_NO_NO-SILK]  22.1,180.85 180 bottom
JP203  JUMPER-SMT_2_NO_NO-SILK  [SMT-JUMPER_2_NO_NO-SILK]  22.1,178.31 180 bottom
JP204  JUMPER-SMT_2_NO_NO-SILK  [SMT-JUMPER_2_NO_NO-SILK]  22.1,173.23 180 bottom
JP205  JUMPER-SMT_2_NO_NO-SILK  [SMT-JUMPER_2_NO_NO-SILK]  22.1,175.77 180 bottom
JP206  JUMPER-SMT_2_NO_NO-SILK  [SMT-JUMPER_2_NO_NO-SILK]  22.1,170.69 180 bottom
JP207  JUMPER-SMT_2_NO_NO-SILK  [SMT-JUMPER_2_NO_NO-SILK]  22.1,183.39 180 bottom
JP208  JUMPER-SMT_2_NC_TRACE_NO-SILK  [SMT-JUMPER_2_NC_TRACE_NO-SILK]  36.58,188.47 0 bottom
JP209  JUMPER-SMT_2_NO_NO-SILK  [SMT-JUMPER_2_NO_NO-SILK]  37.46,191.01 0 bottom
JP210  JUMPER-SMT_2_NO_NO-SILK  [SMT-JUMPER_2_NO_NO-SILK]  45.47,180.85 180 bottom
JP211  JUMPER-SMT_2_NO_NO-SILK  [SMT-JUMPER_2_NO_NO-SILK]  45.47,178.31 180 bottom
JP212  JUMPER-SMT_2_NO_NO-SILK  [SMT-JUMPER_2_NO_NO-SILK]  45.47,173.23 180 bottom
JP213  JUMPER-SMT_2_NO_NO-SILK  [SMT-JUMPER_2_NO_NO-SILK]  45.47,175.77 180 bottom
JP214  JUMPER-SMT_2_NO_NO-SILK  [SMT-JUMPER_2_NO_NO-SILK]  45.47,170.69 180 bottom
JP215  JUMPER-SMT_2_NO_NO-SILK  [SMT-JUMPER_2_NO_NO-SILK]  45.47,183.39 180 bottom
JP216  JUMPER-SMT_2_NC_TRACE_NO-SILK  [SMT-JUMPER_2_NC_TRACE_NO-SILK]  59.94,188.47 0 bottom
JP217  JUMPER-SMT_2_NO_NO-SILK  [SMT-JUMPER_2_NO_NO-SILK]  60.83,191.01 0 bottom
JP218  JUMPER-SMT_2_NO_NO-SILK  [SMT-JUMPER_2_NO_NO-SILK]  68.83,180.85 180 bottom
JP219  JUMPER-SMT_2_NO_NO-SILK  [SMT-JUMPER_2_NO_NO-SILK]  68.83,178.31 180 bottom
JP220  JUMPER-SMT_2_NO_NO-SILK  [SMT-JUMPER_2_NO_NO-SILK]  68.83,173.23 180 bottom
JP221  JUMPER-SMT_2_NO_NO-SILK  [SMT-JUMPER_2_NO_NO-SILK]  68.83,175.77 180 bottom
JP222  JUMPER-SMT_2_NO_NO-SILK  [SMT-JUMPER_2_NO_NO-SILK]  68.83,170.69 180 bottom
JP223  JUMPER-SMT_2_NO_NO-SILK  [SMT-JUMPER_2_NO_NO-SILK]  68.83,183.39 180 bottom
JP224  JUMPER-SMT_2_NC_TRACE_NO-SILK  [SMT-JUMPER_2_NC_TRACE_NO-SILK]  83.31,188.47 0 bottom
JP225  JUMPER-SMT_2_NO_NO-SILK  [SMT-JUMPER_2_NO_NO-SILK]  84.2,191.01 0 bottom
JP226  JUMPER-SMT_2_NO_NO-SILK  [SMT-JUMPER_2_NO_NO-SILK]  92.2,180.85 180 bottom
JP227  JUMPER-SMT_2_NO_NO-SILK  [SMT-JUMPER_2_NO_NO-SILK]  92.2,178.31 180 bottom
JP228  JUMPER-SMT_2_NO_NO-SILK  [SMT-JUMPER_2_NO_NO-SILK]  92.2,173.23 180 bottom
JP229  JUMPER-SMT_2_NO_NO-SILK  [SMT-JUMPER_2_NO_NO-SILK]  92.2,175.77 180 bottom
JP230  JUMPER-SMT_2_NO_NO-SILK  [SMT-JUMPER_2_NO_NO-SILK]  92.2,170.69 180 bottom
JP231  JUMPER-SMT_2_NO_NO-SILK  [SMT-JUMPER_2_NO_NO-SILK]  92.2,183.39 180 bottom
JP232  JUMPER-SMT_2_NC_TRACE_NO-SILK  [SMT-JUMPER_2_NC_TRACE_NO-SILK]  106.68,188.47 0 bottom
JP233  JUMPER-SMT_2_NO_NO-SILK  [SMT-JUMPER_2_NO_NO-SILK]  107.57,191.01 0 bottom
JP234  JUMPER-SMT_2_NO_NO-SILK  [SMT-JUMPER_2_NO_NO-SILK]  115.57,180.85 180 bottom
JP235  JUMPER-SMT_2_NO_NO-SILK  [SMT-JUMPER_2_NO_NO-SILK]  115.57,178.31 180 bottom
JP236  JUMPER-SMT_2_NO_NO-SILK  [SMT-JUMPER_2_NO_NO-SILK]  115.57,173.23 180 bottom
JP237  JUMPER-SMT_2_NO_NO-SILK  [SMT-JUMPER_2_NO_NO-SILK]  115.57,175.77 180 bottom
JP238  JUMPER-SMT_2_NO_NO-SILK  [SMT-JUMPER_2_NO_NO-SILK]  115.57,170.69 180 bottom
JP239  JUMPER-SMT_2_NO_NO-SILK  [SMT-JUMPER_2_NO_NO-SILK]  115.57,183.39 180 bottom
LOGO1  OSHW-LOGOS  [OSHW-LOGO-S]  38.61,15.11 0 bottom
LOGO2  OSHW-LOGOS  [OSHW-LOGO-S]  15.24,15.11 0 bottom
LOGO3  OSHW-LOGOS  [OSHW-LOGO-S]  61.98,15.11 0 bottom
LOGO4  OSHW-LOGOS  [OSHW-LOGO-S]  85.34,15.11 0 bottom
LOGO5  OSHW-LOGOS  [OSHW-LOGO-S]  108.71,15.11 0 bottom
LOGO6  OSHW-LOGOS  [OSHW-LOGO-S]  15.24,46.1 0 bottom
LOGO7  OSHW-LOGOS  [OSHW-LOGO-S]  38.61,46.1 0 bottom
LOGO8  OSHW-LOGOS  [OSHW-LOGO-S]  61.98,46.1 0 bottom
LOGO9  OSHW-LOGOS  [OSHW-LOGO-S]  85.34,46.1 0 bottom
LOGO10  OSHW-LOGOS  [OSHW-LOGO-S]  108.71,46.1 0 bottom
LOGO11  OSHW-LOGOS  [OSHW-LOGO-S]  15.24,77.09 0 bottom
LOGO12  OSHW-LOGOS  [OSHW-LOGO-S]  38.61,77.09 0 bottom
LOGO13  OSHW-LOGOS  [OSHW-LOGO-S]  61.98,77.09 0 bottom
LOGO14  OSHW-LOGOS  [OSHW-LOGO-S]  85.34,77.09 0 bottom
LOGO15  OSHW-LOGOS  [OSHW-LOGO-S]  108.71,77.09 0 bottom
LOGO16  OSHW-LOGOS  [OSHW-LOGO-S]  15.24,108.08 0 bottom
LOGO17  OSHW-LOGOS  [OSHW-LOGO-S]  38.61,108.08 0 bottom
LOGO18  OSHW-LOGOS  [OSHW-LOGO-S]  61.98,108.08 0 bottom
LOGO19  OSHW-LOGOS  [OSHW-LOGO-S]  85.34,108.08 0 bottom
LOGO20  OSHW-LOGOS  [OSHW-LOGO-S]  108.71,108.08 0 bottom
LOGO21  OSHW-LOGOS  [OSHW-LOGO-S]  15.24,139.06 0 bottom
LOGO22  OSHW-LOGOS  [OSHW-LOGO-S]  38.61,139.06 0 bottom
LOGO23  OSHW-LOGOS  [OSHW-LOGO-S]  61.98,139.06 0 bottom
LOGO24  OSHW-LOGOS  [OSHW-LOGO-S]  85.34,139.06 0 bottom
LOGO25  OSHW-LOGOS  [OSHW-LOGO-S]  108.71,139.06 0 bottom
LOGO26  OSHW-LOGOS  [OSHW-LOGO-S]  15.24,170.05 0 bottom
LOGO27  OSHW-LOGOS  [OSHW-LOGO-S]  38.61,170.05 0 bottom
LOGO28  OSHW-LOGOS  [OSHW-LOGO-S]  61.98,170.05 0 bottom
LOGO29  OSHW-LOGOS  [OSHW-LOGO-S]  85.34,170.05 0 bottom
LOGO30  OSHW-LOGOS  [OSHW-LOGO-S]  108.71,170.05 0 bottom
R1  10k  [0603]  14.48,7.87 0 top
R2  10k  [0603]  37.85,7.87 0 top
R3  10k  [0603]  61.21,7.87 0 top
R4  10k  [0603]  84.58,7.87 0 top
R5  10k  [0603]  107.95,7.87 0 top
R6  10k  [0603]  14.48,38.86 0 top
R7  10k  [0603]  37.85,38.86 0 top
R8  10k  [0603]  61.21,38.86 0 top
R9  10k  [0603]  84.58,38.86 0 top
R10  10k  [0603]  107.95,38.86 0 top
R11  10k  [0603]  14.48,69.85 0 top
R12  10k  [0603]  37.85,69.85 0 top
R13  10k  [0603]  61.21,69.85 0 top
R14  10k  [0603]  84.58,69.85 0 top
R15  10k  [0603]  107.95,69.85 0 top
R16  10k  [0603]  14.48,100.84 0 top
R17  10k  [0603]  37.85,100.84 0 top
R18  10k  [0603]  61.21,100.84 0 top
R19  10k  [0603]  84.58,100.84 0 top
R20  10k  [0603]  107.95,100.84 0 top
R21  10k  [0603]  14.48,131.83 0 top
R22  10k  [0603]  37.85,131.83 0 top
R23  10k  [0603]  61.21,131.83 0 top
R24  10k  [0603]  84.58,131.83 0 top
R25  10k  [0603]  107.95,131.83 0 top
R26  10k  [0603]  14.48,162.81 0 top
R27  10k  [0603]  37.85,162.81 0 top
R28  10k  [0603]  61.21,162.81 0 top
R29  10k  [0603]  84.58,162.81 0 top
R30  10k  [0603]  107.95,162.81 0 top
U1  RFM97CW  [RFM97]  41.66,19.56 270 top
U2  RFM97CW  [RFM97]  65.02,19.56 270 top
U3  RFM97CW  [RFM97]  88.39,19.56 270 top
U4  RFM97CW  [RFM97]  18.29,19.56 270 top
U5  RFM97CW  [RFM97]  111.76,19.56 270 top
U6  RFM97CW  [RFM97]  18.29,50.55 270 top
U7  RFM97CW  [RFM97]  41.66,50.55 270 top
U8  RFM97CW  [RFM97]  65.02,50.55 270 top
U9  RFM97CW  [RFM97]  88.39,50.55 270 top
U10  RFM97CW  [RFM97]  111.76,50.55 270 top
U11  RFM97CW  [RFM97]  18.29,81.53 270 top
U12  RFM97CW  [RFM97]  41.66,81.53 270 top
U13  RFM97CW  [RFM97]  65.02,81.53 270 top
U14  RFM97CW  [RFM97]  88.39,81.53 270 top
U15  RFM97CW  [RFM97]  111.76,81.53 270 top
U16  RFM97CW  [RFM97]  18.29,112.52 270 top
U17  RFM97CW  [RFM97]  41.66,112.52 270 top
U18  RFM97CW  [RFM97]  65.02,112.52 270 top
U19  RFM97CW  [RFM97]  88.39,112.52 270 top
U20  RFM97CW  [RFM97]  111.76,112.52 270 top
U21  RFM97CW  [RFM97]  18.29,143.51 270 top
U22  RFM97CW  [RFM97]  41.66,143.51 270 top
U23  RFM97CW  [RFM97]  65.02,143.51 270 top
U24  RFM97CW  [RFM97]  88.39,143.51 270 top
U25  RFM97CW  [RFM97]  111.76,143.51 270 top
U26  RFM97CW  [RFM97]  18.29,174.5 270 top
U27  RFM97CW  [RFM97]  41.66,174.5 270 top
U28  RFM97CW  [RFM97]  65.02,174.5 270 top
U29  RFM97CW  [RFM97]  88.39,174.5 270 top
U30  RFM97CW  [RFM97]  111.76,174.5 270 top
U$1  [ANT0]  15.49,32.64 90 top
U$2  [##CS##2]  10.41,33.53 0 bottom
U$3  [#SDO#0]  25.78,36.07 0 top
U$4  [#SDI#1]  26.04,33.53 0 top
U$5  [#SCK#0]  25.91,30.99 0 top
U$6  [#SDI#1]  26.04,33.53 0 bottom
U$7  [#SDO#0]  25.78,36.07 0 bottom
U$8  [#3V3#0]  25.78,8.13 0 top
U$9  [#3V3#0]  25.78,8.13 0 bottom
U$10  [#GND#1]  25.78,13.21 0 bottom
U$11  [MINI0]  15.24,20.83 0 bottom
U$12  [#SCK#0]  25.91,30.99 0 bottom
U$13  [##RST##0]  10.92,36.07 0 top
U$14  [ANT0]  38.86,32.64 90 top
U$15  [#SDI#1]  49.4,33.53 0 bottom
U$16  [#SDO#0]  49.15,36.07 0 bottom
U$17  [##RST##0]  10.92,36.07 0 bottom
U$18  [#3V3#0]  49.15,8.13 0 top
U$19  [RFM970]  15.24,23.37 0 bottom
U$20  [SHIELD2]  15.24,18.29 0 bottom
U$21  [##CS##2]  10.41,33.53 0 top
U$22  SPARKX-LOGO5  [SPARKX-LARGE]  15.24,27.18 0 bottom
U$23  [#DIO0#0]  25.59,15.75 0 bottom
U$24  [#DIO1#0]  25.72,18.29 0 bottom
U$25  [#DIO2#0]  25.53,20.83 0 bottom
U$26  [#DIO3#0]  25.53,23.37 0 bottom
U$27  [#DIO4#0]  25.59,25.91 0 bottom
U$28  [#DIO5#0]  25.65,28.45 0 bottom
U$29  [#3V3#0]  49.15,8.13 0 bottom
U$30  [#GND#1]  49.15,13.21 0 bottom
U$31  [RFM970]  38.61,23.37 0 bottom
U$32  [SHIELD2]  38.61,18.29 0 bottom
U$33  [##CS##2]  33.78,33.53 0 top
U$34  [##CS##2]  33.78,33.53 0 bottom
U$35  [#SDO#0]  49.15,36.07 0 top
U$36  [#SDI#1]  49.4,33.53 0 top
U$37  SPARKX-LOGO5  [SPARKX-LARGE]  38.61,27.18 0 bottom
U$38  [##RST##0]  34.29,36.07 0 bottom
U$39  [#DIO0#0]  48.96,15.75 0 bottom
U$40  [#DIO1#0]  49.09,18.29 0 bottom
U$41  [#DIO2#0]  48.89,20.83 0 bottom
U$42  [#DIO3#0]  48.89,23.37 0 bottom
U$43  [#DIO4#0]  48.96,25.91 0 bottom
U$44  [#DIO5#0]  49.02,28.45 0 bottom
U$45  [#SCK#0]  49.28,30.99 0 top
U$46  [#SCK#0]  49.28,30.99 0 bottom
U$47  [##RST##0]  34.29,36.07 0 top
U$48  [MINI0]  38.61,20.83 0 bottom
U$49  [ANT0]  62.23,32.64 90 top
U$50  [#SDI#1]  72.77,33.53 0 bottom
U$51  [#SDO#0]  72.52,36.07 0 bottom
U$52  [#3V3#0]  72.52,8.13 0 top
U$53  [#3V3#0]  72.52,8.13 0 bottom
U$54  [#GND#1]  72.52,13.21 0 bottom
U$55  [RFM970]  61.98,23.37 0 bottom
U$56  [SHIELD2]  61.98,18.29 0 bottom
U$57  [##CS##2]  57.15,33.53 0 top
U$58  [##CS##2]  57.15,33.53 0 bottom
U$59  [#SDO#0]  72.52,36.07 0 top
U$60  [#SDI#1]  72.77,33.53 0 top
U$61  SPARKX-LOGO5  [SPARKX-LARGE]  61.98,27.18 0 bottom
U$62  [##RST##0]  57.66,36.07 0 bottom
U$63  [#DIO0#0]  72.33,15.75 0 bottom
U$64  [#DIO1#0]  72.45,18.29 0 bottom
U$65  [#DIO2#0]  72.26,20.83 0 bottom
U$66  [#DIO3#0]  72.26,23.37 0 bottom
U$67  [#DIO4#0]  72.33,25.91 0 bottom
U$68  [#DIO5#0]  72.39,28.45 0 bottom
U$69  [#SCK#0]  72.64,30.99 0 top
U$70  [#SCK#0]  72.64,30.99 0 bottom
U$71  [##RST##0]  57.66,36.07 0 top
U$72  [MINI0]  61.98,20.83 0 bottom
U$73  [ANT0]  85.6,32.64 90 top
U$74  [#SDI#1]  96.14,33.53 0 bottom
U$75  [#SDO#0]  95.89,36.07 0 bottom
U$76  [#3V3#0]  95.89,8.13 0 top
U$77  [#3V3#0]  95.89,8.13 0 bottom
U$78  [#GND#1]  95.89,13.21 0 bottom
U$79  [RFM970]  85.34,23.37 0 bottom
U$80  [SHIELD2]  85.34,18.29 0 bottom
U$81  [##CS##2]  80.52,33.53 0 top
U$82  [##CS##2]  80.52,33.53 0 bottom
U$83  [#SDO#0]  95.89,36.07 0 top
U$84  [#SDI#1]  96.14,33.53 0 top
U$85  SPARKX-LOGO5  [SPARKX-LARGE]  85.34,27.18 0 bottom
U$86  [##RST##0]  81.03,36.07 0 bottom
U$87  [#DIO0#0]  95.69,15.75 0 bottom
U$88  [#DIO1#0]  95.82,18.29 0 bottom
U$89  [#DIO2#0]  95.63,20.83 0 bottom
U$90  [#DIO3#0]  95.63,23.37 0 bottom
U$91  [#DIO4#0]  95.69,25.91 0 bottom
U$92  [#DIO5#0]  95.76,28.45 0 bottom
U$93  [#SCK#0]  96.01,30.99 0 top
U$94  [#SCK#0]  96.01,30.99 0 bottom
U$95  [##RST##0]  81.03,36.07 0 top
U$96  [MINI0]  85.34,20.83 0 bottom
U$97  [ANT0]  108.97,32.64 90 top
U$98  [#SDI#1]  119.51,33.53 0 bottom
U$99  [#SDO#0]  119.25,36.07 0 bottom
U$100  [#3V3#0]  119.25,8.13 0 top
U$101  [#3V3#0]  119.25,8.13 0 bottom
U$102  [#GND#1]  119.25,13.21 0 bottom
U$103  [RFM970]  108.71,23.37 0 bottom
U$104  [SHIELD2]  108.71,18.29 0 bottom
U$105  [##CS##2]  103.89,33.53 0 top
U$106  [##CS##2]  103.89,33.53 0 bottom
U$107  [#SDO#0]  119.25,36.07 0 top
U$108  [#SDI#1]  119.51,33.53 0 top
U$109  SPARKX-LOGO5  [SPARKX-LARGE]  108.71,27.18 0 bottom
U$110  [##RST##0]  104.39,36.07 0 bottom
U$111  [#DIO0#0]  119.06,15.75 0 bottom
U$112  [#DIO1#0]  119.19,18.29 0 bottom
U$113  [#DIO2#0]  119,20.83 0 bottom
U$114  [#DIO3#0]  119,23.37 0 bottom
U$115  [#DIO4#0]  119.06,25.91 0 bottom
U$116  [#DIO5#0]  119.13,28.45 0 bottom
U$117  [#SCK#0]  119.38,30.99 0 top
U$118  [#SCK#0]  119.38,30.99 0 bottom
U$119  [##RST##0]  104.39,36.07 0 top
U$120  [MINI0]  108.71,20.83 0 bottom
U$121  [ANT0]  15.49,63.63 90 top
U$122  [#SDI#1]  26.04,64.52 0 bottom
U$123  [#SDO#0]  25.78,67.06 0 bottom
U$124  [#3V3#0]  25.78,39.12 0 top
U$125  [#3V3#0]  25.78,39.12 0 bottom
U$126  [#GND#1]  25.78,44.2 0 bottom
U$127  [RFM970]  15.24,54.36 0 bottom
U$128  [SHIELD2]  15.24,49.28 0 bottom
U$129  [##CS##2]  10.41,64.52 0 top
U$130  [##CS##2]  10.41,64.52 0 bottom
U$131  [#SDO#0]  25.78,67.06 0 top
U$132  [#SDI#1]  26.04,64.52 0 top
U$133  SPARKX-LOGO5  [SPARKX-LARGE]  15.24,58.17 0 bottom
U$134  [##RST##0]  10.92,67.06 0 bottom
U$135  [#DIO0#0]  25.59,46.74 0 bottom
U$136  [#DIO1#0]  25.72,49.28 0 bottom
U$137  [#DIO2#0]  25.53,51.82 0 bottom
U$138  [#DIO3#0]  25.53,54.36 0 bottom
U$139  [#DIO4#0]  25.59,56.9 0 bottom
U$140  [#DIO5#0]  25.65,59.44 0 bottom
U$141  [#SCK#0]  25.91,61.98 0 top
U$142  [#SCK#0]  25.91,61.98 0 bottom
U$143  [##RST##0]  10.92,67.06 0 top
U$144  [MINI0]  15.24,51.82 0 bottom
U$145  [ANT0]  38.86,63.63 90 top
U$146  [#SDI#1]  49.4,64.52 0 bottom
U$147  [#SDO#0]  49.15,67.06 0 bottom
U$148  [#3V3#0]  49.15,39.12 0 top
U$149  [#3V3#0]  49.15,39.12 0 bottom
U$150  [#GND#1]  49.15,44.2 0 bottom
U$151  [RFM970]  38.61,54.36 0 bottom
U$152  [SHIELD2]  38.61,49.28 0 bottom
U$153  [##CS##2]  33.78,64.52 0 top
U$154  [##CS##2]  33.78,64.52 0 bottom
U$155  [#SDO#0]  49.15,67.06 0 top
U$156  [#SDI#1]  49.4,64.52 0 top
U$157  SPARKX-LOGO5  [SPARKX-LARGE]  38.61,58.17 0 bottom
U$158  [##RST##0]  34.29,67.06 0 bottom
U$159  [#DIO0#0]  48.96,46.74 0 bottom
U$160  [#DIO1#0]  49.09,49.28 0 bottom
U$161  [#DIO2#0]  48.89,51.82 0 bottom
U$162  [#DIO3#0]  48.89,54.36 0 bottom
U$163  [#DIO4#0]  48.96,56.9 0 bottom
U$164  [#DIO5#0]  49.02,59.44 0 bottom
U$165  [#SCK#0]  49.28,61.98 0 top
U$166  [#SCK#0]  49.28,61.98 0 bottom
U$167  [##RST##0]  34.29,67.06 0 top
U$168  [MINI0]  38.61,51.82 0 bottom
U$169  [ANT0]  62.23,63.63 90 top
U$170  [#SDI#1]  72.77,64.52 0 bottom
U$171  [#SDO#0]  72.52,67.06 0 bottom
U$172  [#3V3#0]  72.52,39.12 0 top
U$173  [#3V3#0]  72.52,39.12 0 bottom
U$174  [#GND#1]  72.52,44.2 0 bottom
U$175  [RFM970]  61.98,54.36 0 bottom
U$176  [SHIELD2]  61.98,49.28 0 bottom
U$177  [##CS##2]  57.15,64.52 0 top
U$178  [##CS##2]  57.15,64.52 0 bottom
U$179  [#SDO#0]  72.52,67.06 0 top
U$180  [#SDI#1]  72.77,64.52 0 top
U$181  SPARKX-LOGO5  [SPARKX-LARGE]  61.98,58.17 0 bottom
U$182  [##RST##0]  57.66,67.06 0 bottom
U$183  [#DIO0#0]  72.33,46.74 0 bottom
U$184  [#DIO1#0]  72.45,49.28 0 bottom
U$185  [#DIO2#0]  72.26,51.82 0 bottom
U$186  [#DIO3#0]  72.26,54.36 0 bottom
U$187  [#DIO4#0]  72.33,56.9 0 bottom
U$188  [#DIO5#0]  72.39,59.44 0 bottom
U$189  [#SCK#0]  72.64,61.98 0 top
U$190  [#SCK#0]  72.64,61.98 0 bottom
U$191  [##RST##0]  57.66,67.06 0 top
U$192  [MINI0]  61.98,51.82 0 bottom
U$193  [ANT0]  85.6,63.63 90 top
U$194  [#SDI#1]  96.14,64.52 0 bottom
U$195  [#SDO#0]  95.89,67.06 0 bottom
U$196  [#3V3#0]  95.89,39.12 0 top
U$197  [#3V3#0]  95.89,39.12 0 bottom
U$198  [#GND#1]  95.89,44.2 0 bottom
U$199  [RFM970]  85.34,54.36 0 bottom
U$200  [SHIELD2]  85.34,49.28 0 bottom
U$201  [##CS##2]  80.52,64.52 0 top
U$202  [##CS##2]  80.52,64.52 0 bottom
U$203  [#SDO#0]  95.89,67.06 0 top
U$204  [#SDI#1]  96.14,64.52 0 top
U$205  SPARKX-LOGO5  [SPARKX-LARGE]  85.34,58.17 0 bottom
U$206  [##RST##0]  81.03,67.06 0 bottom
U$207  [#DIO0#0]  95.69,46.74 0 bottom
U$208  [#DIO1#0]  95.82,49.28 0 bottom
U$209  [#DIO2#0]  95.63,51.82 0 bottom
U$210  [#DIO3#0]  95.63,54.36 0 bottom
U$211  [#DIO4#0]  95.69,56.9 0 bottom
U$212  [#DIO5#0]  95.76,59.44 0 bottom
U$213  [#SCK#0]  96.01,61.98 0 top
U$214  [#SCK#0]  96.01,61.98 0 bottom
U$215  [##RST##0]  81.03,67.06 0 top
U$216  [MINI0]  85.34,51.82 0 bottom
U$217  [ANT0]  108.97,63.63 90 top
U$218  [#SDI#1]  119.51,64.52 0 bottom
U$219  [#SDO#0]  119.25,67.06 0 bottom
U$220  [#3V3#0]  119.25,39.12 0 top
U$221  [#3V3#0]  119.25,39.12 0 bottom
U$222  [#GND#1]  119.25,44.2 0 bottom
U$223  [RFM970]  108.71,54.36 0 bottom
U$224  [SHIELD2]  108.71,49.28 0 bottom
U$225  [##CS##2]  103.89,64.52 0 top
U$226  [##CS##2]  103.89,64.52 0 bottom
U$227  [#SDO#0]  119.25,67.06 0 top
U$228  [#SDI#1]  119.51,64.52 0 top
U$229  SPARKX-LOGO5  [SPARKX-LARGE]  108.71,58.17 0 bottom
U$230  [##RST##0]  104.39,67.06 0 bottom
U$231  [#DIO0#0]  119.06,46.74 0 bottom
U$232  [#DIO1#0]  119.19,49.28 0 bottom
U$233  [#DIO2#0]  119,51.82 0 bottom
U$234  [#DIO3#0]  119,54.36 0 bottom
U$235  [#DIO4#0]  119.06,56.9 0 bottom
U$236  [#DIO5#0]  119.13,59.44 0 bottom
U$237  [#SCK#0]  119.38,61.98 0 top
U$238  [#SCK#0]  119.38,61.98 0 bottom
U$239  [##RST##0]  104.39,67.06 0 top
U$240  [MINI0]  108.71,51.82 0 bottom
U$241  [ANT0]  15.49,94.62 90 top
U$242  [#SDI#1]  26.04,95.5 0 bottom
U$243  [#SDO#0]  25.78,98.04 0 bottom
U$244  [#3V3#0]  25.78,70.1 0 top